# Altium PCB SensWear-V1R1-Debug.PcbDoc
Units mm, origin at the board's own origin, x right, y up, seen from the top; angles counter-clockwise.
Board outline 40 x 35 mm, 4 copper layers (L1, L2 (GND), L3 (VDD), L4), stack 0.33 mm thick; 25 components, 26 nets, 163 pads, 32 vias.
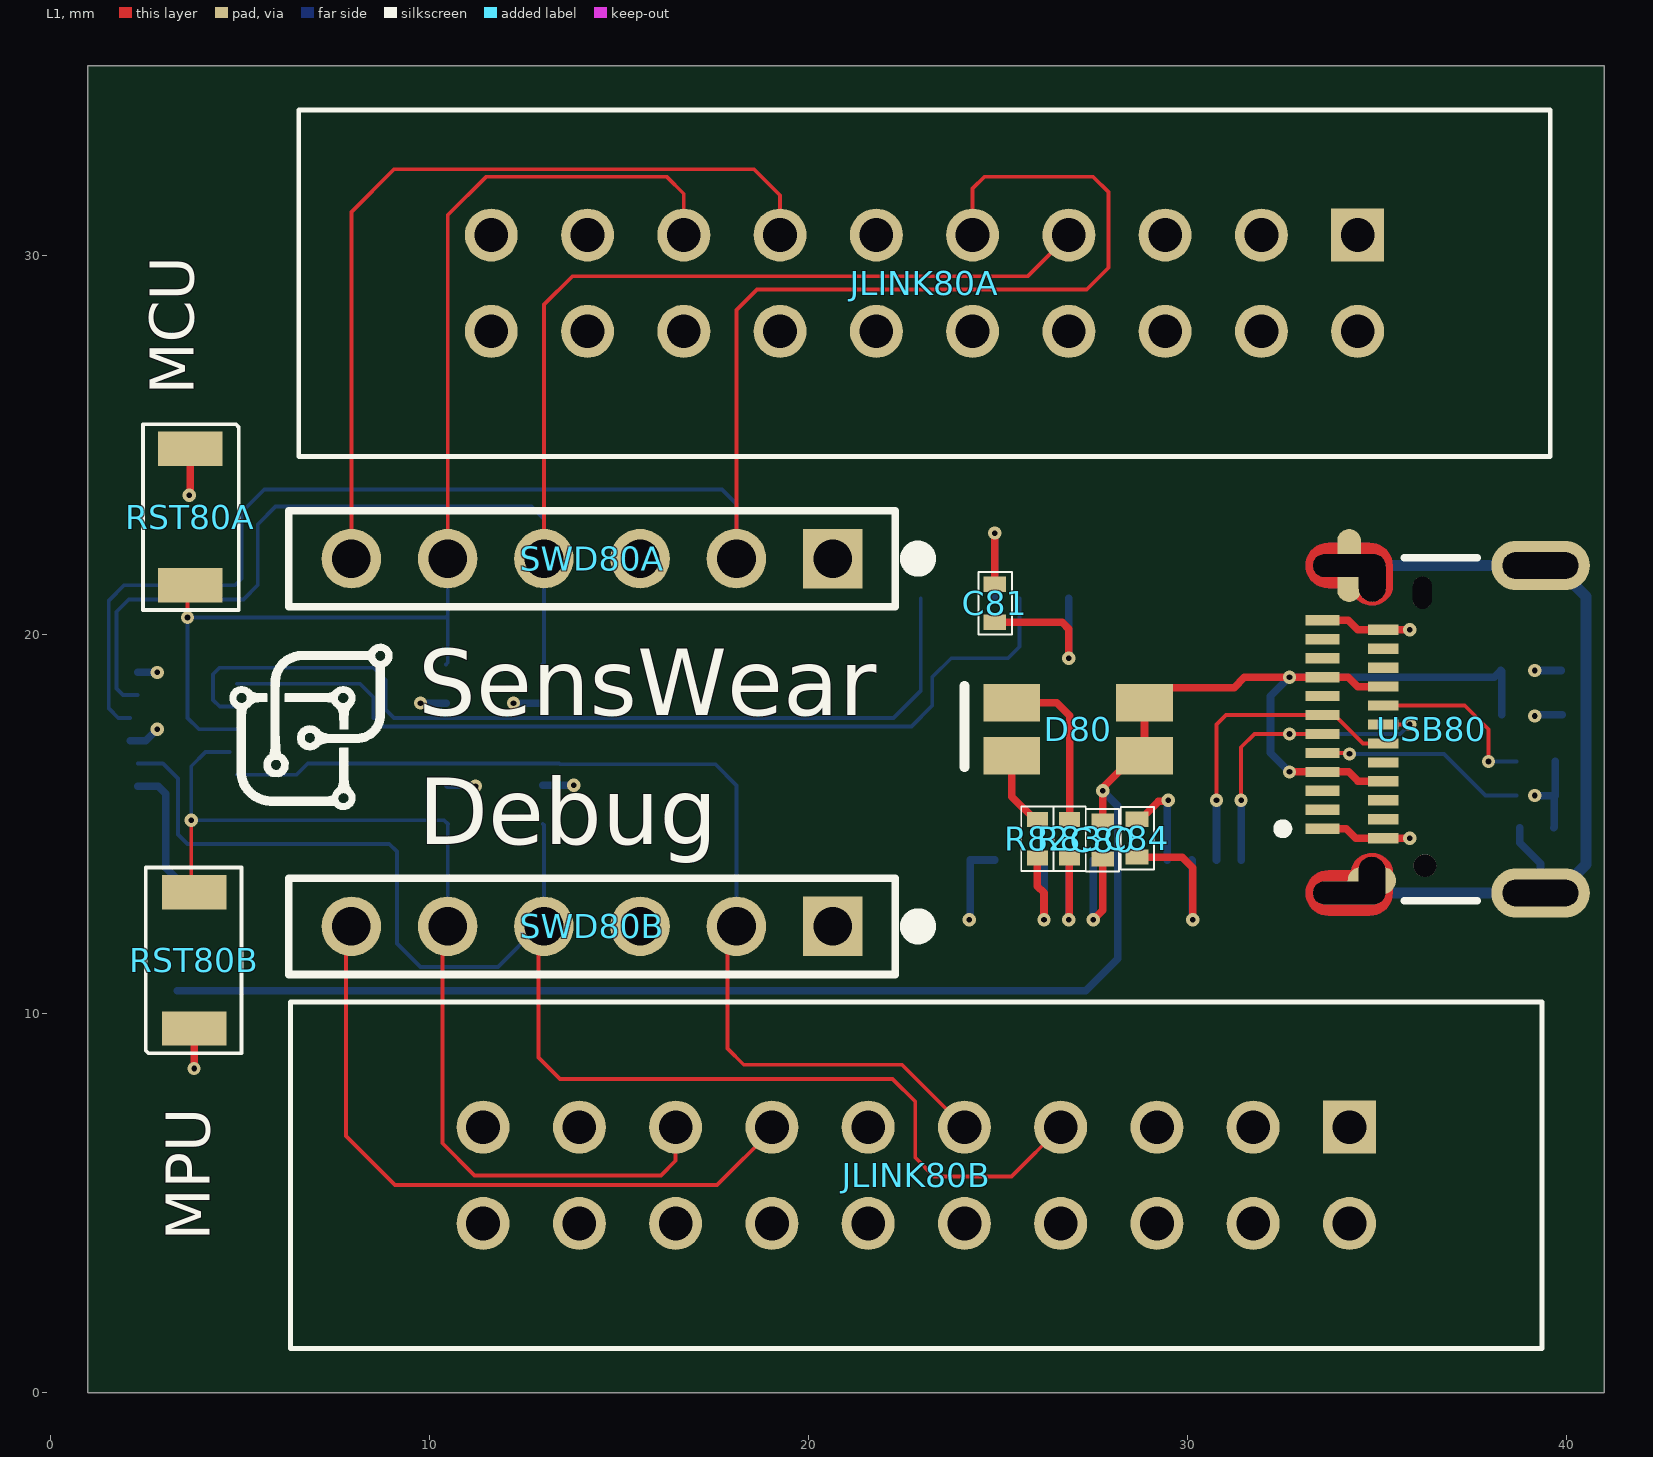
[diagram p0: L1 view]
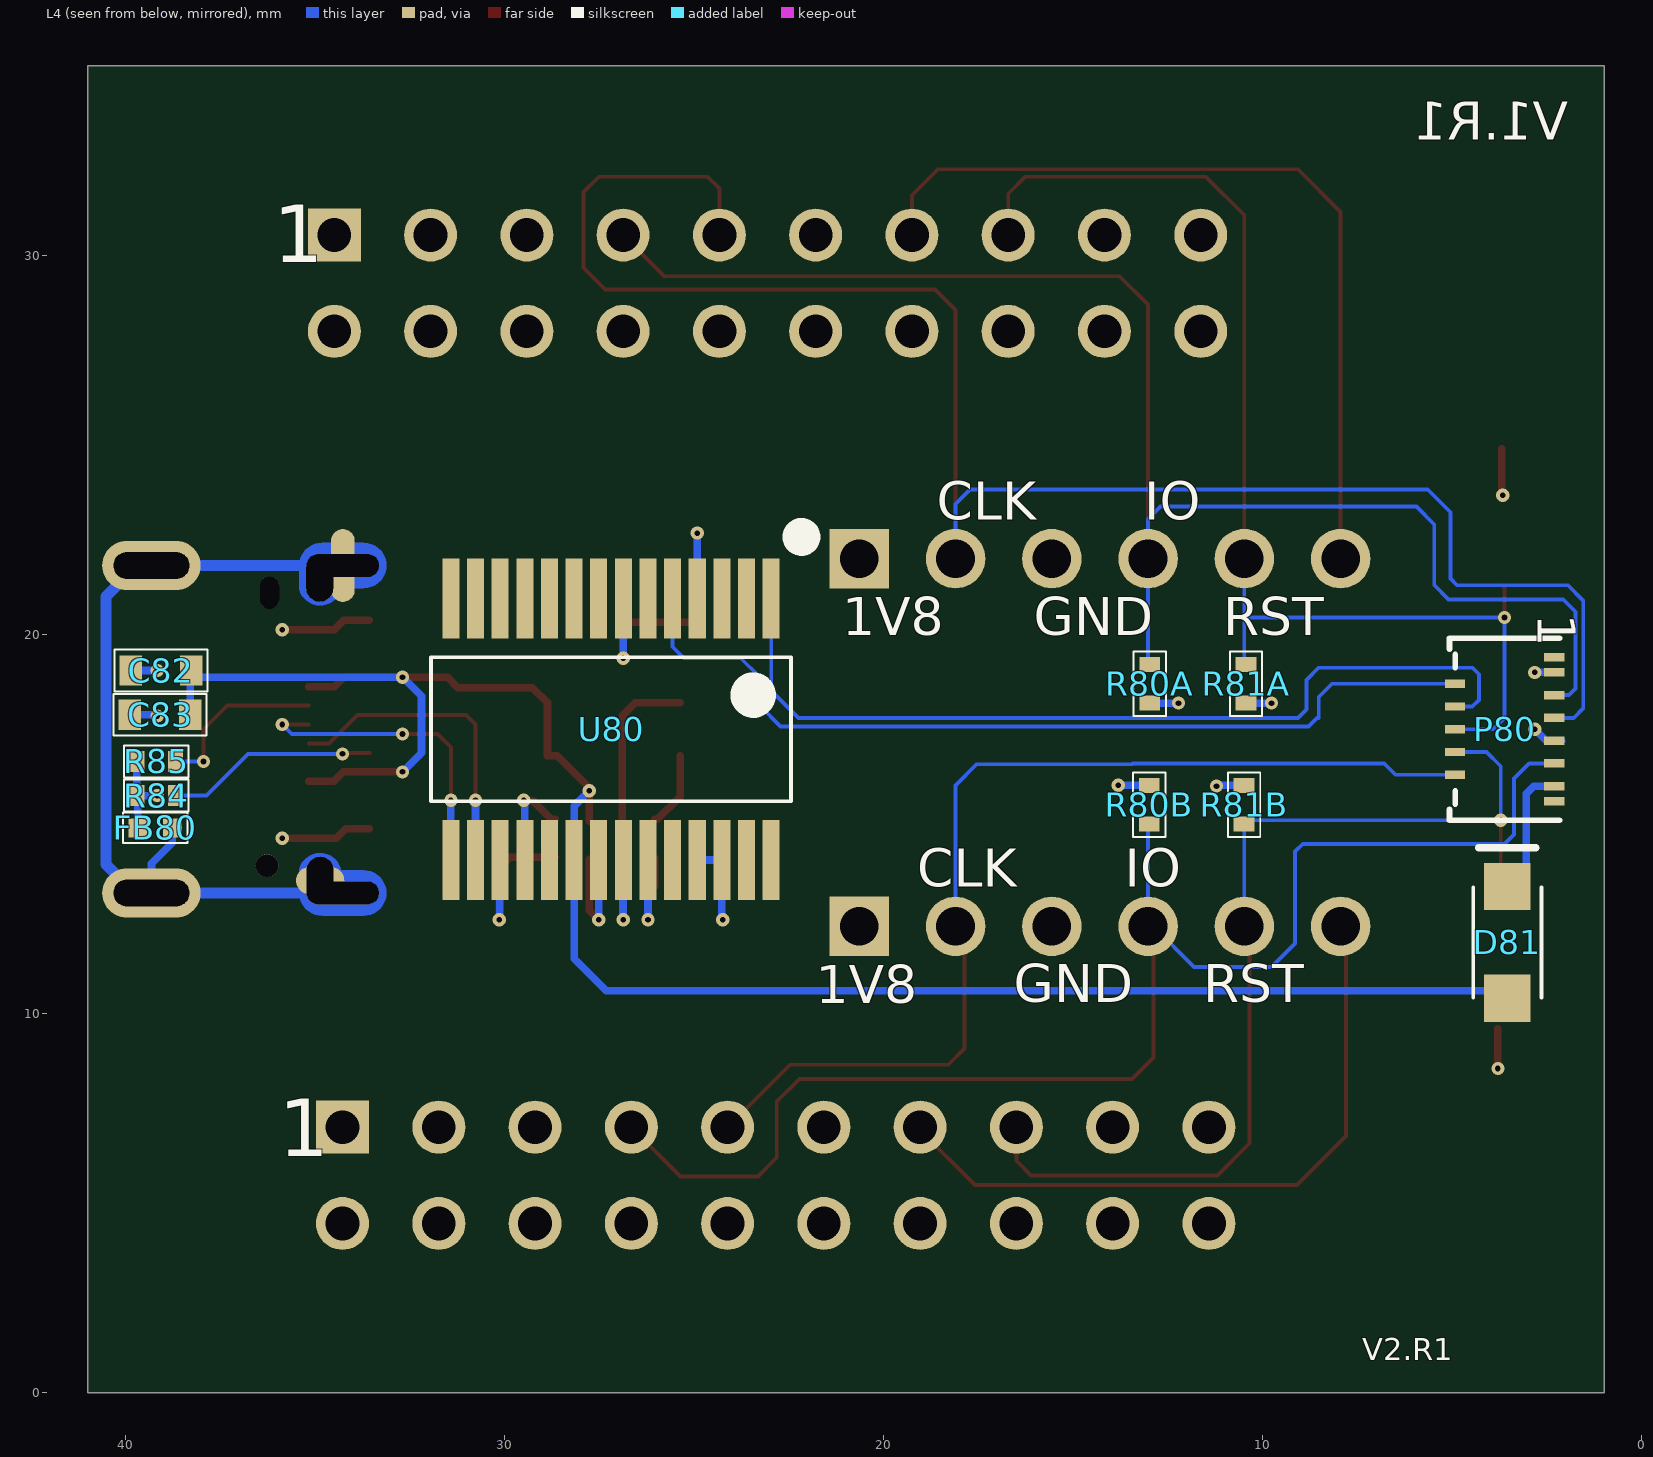
[diagram p1: L4 view, seen from below]
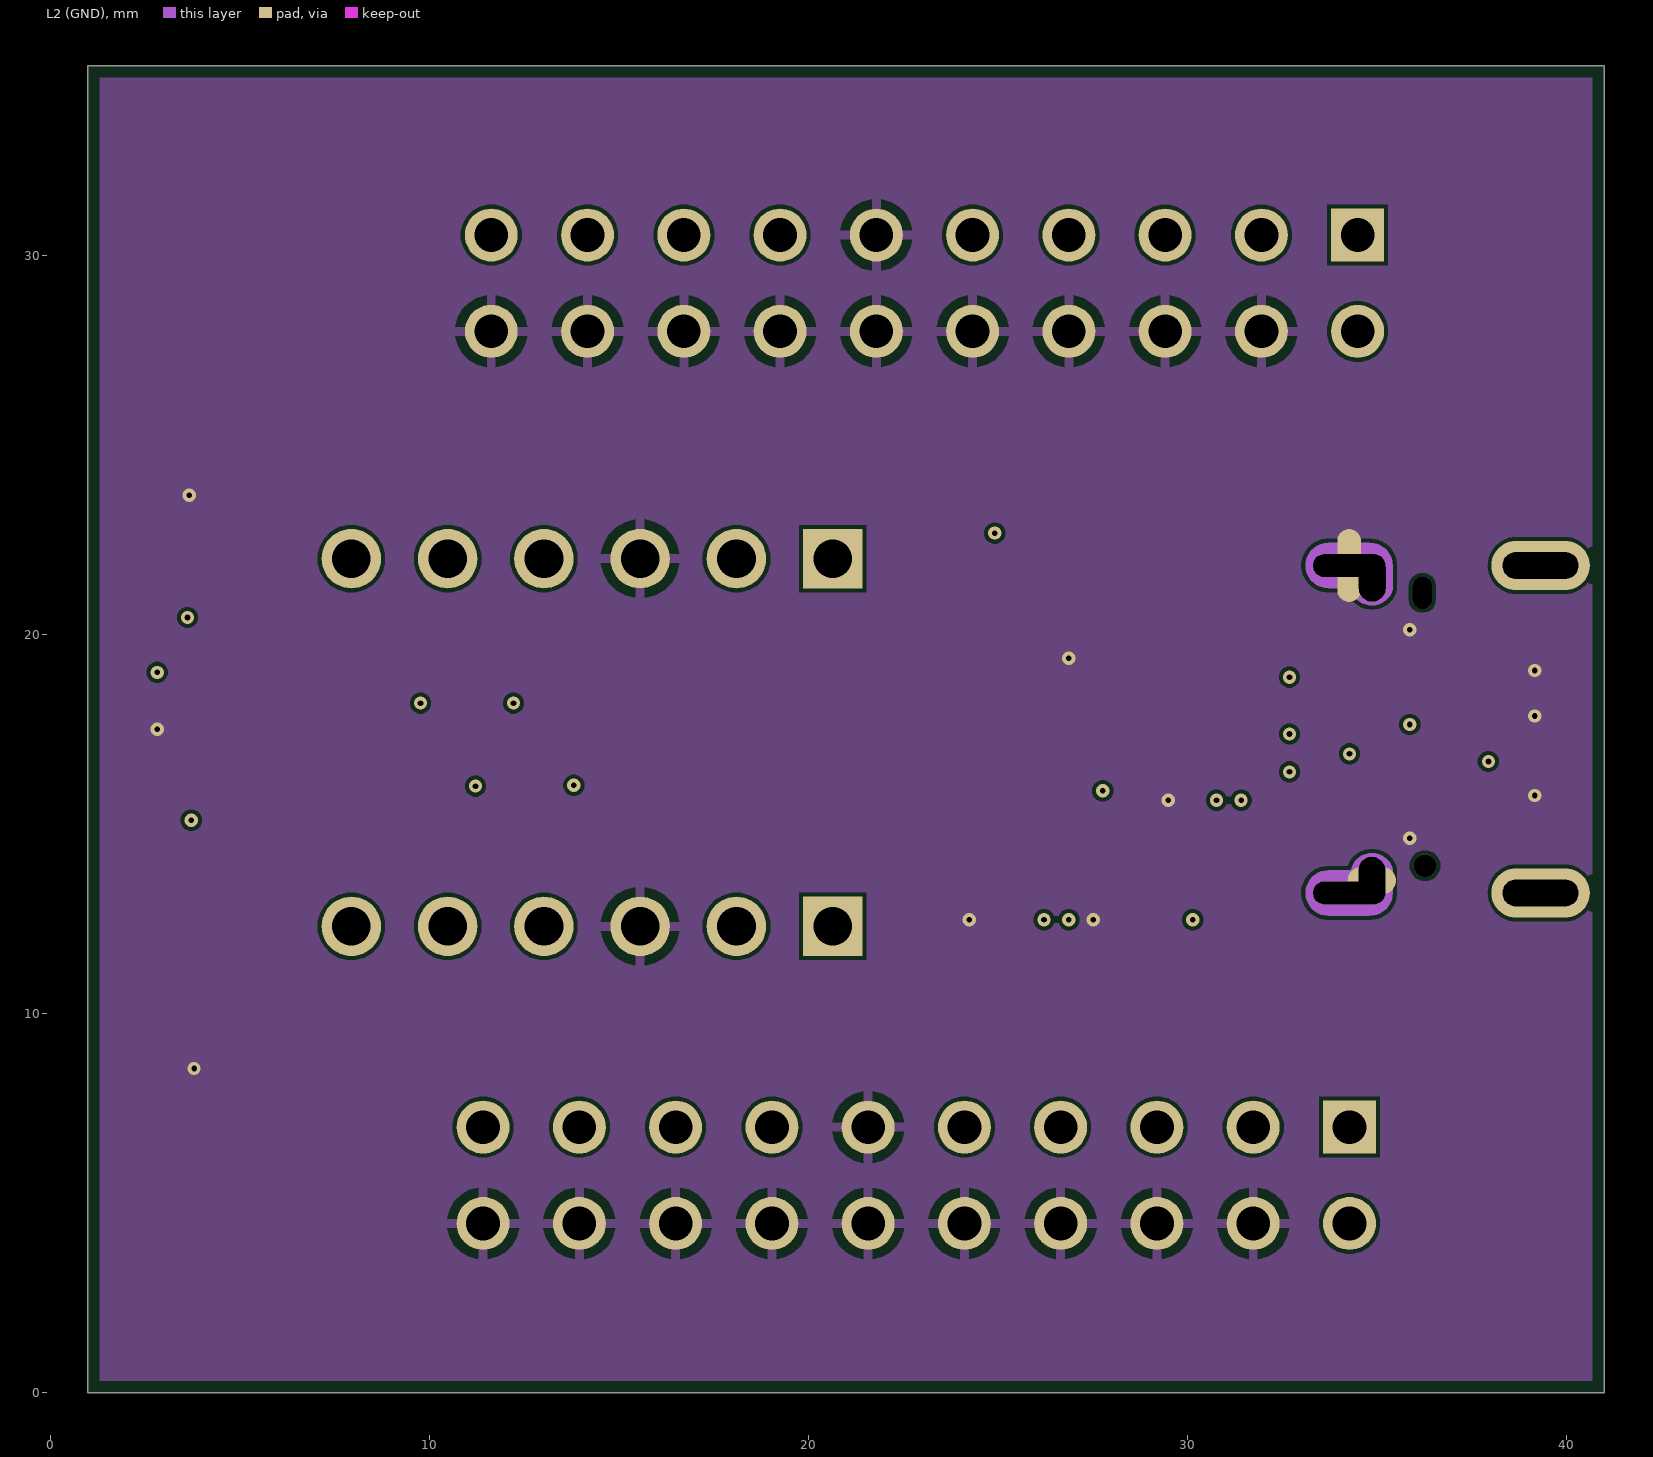
[diagram p2: L2 (GND)]
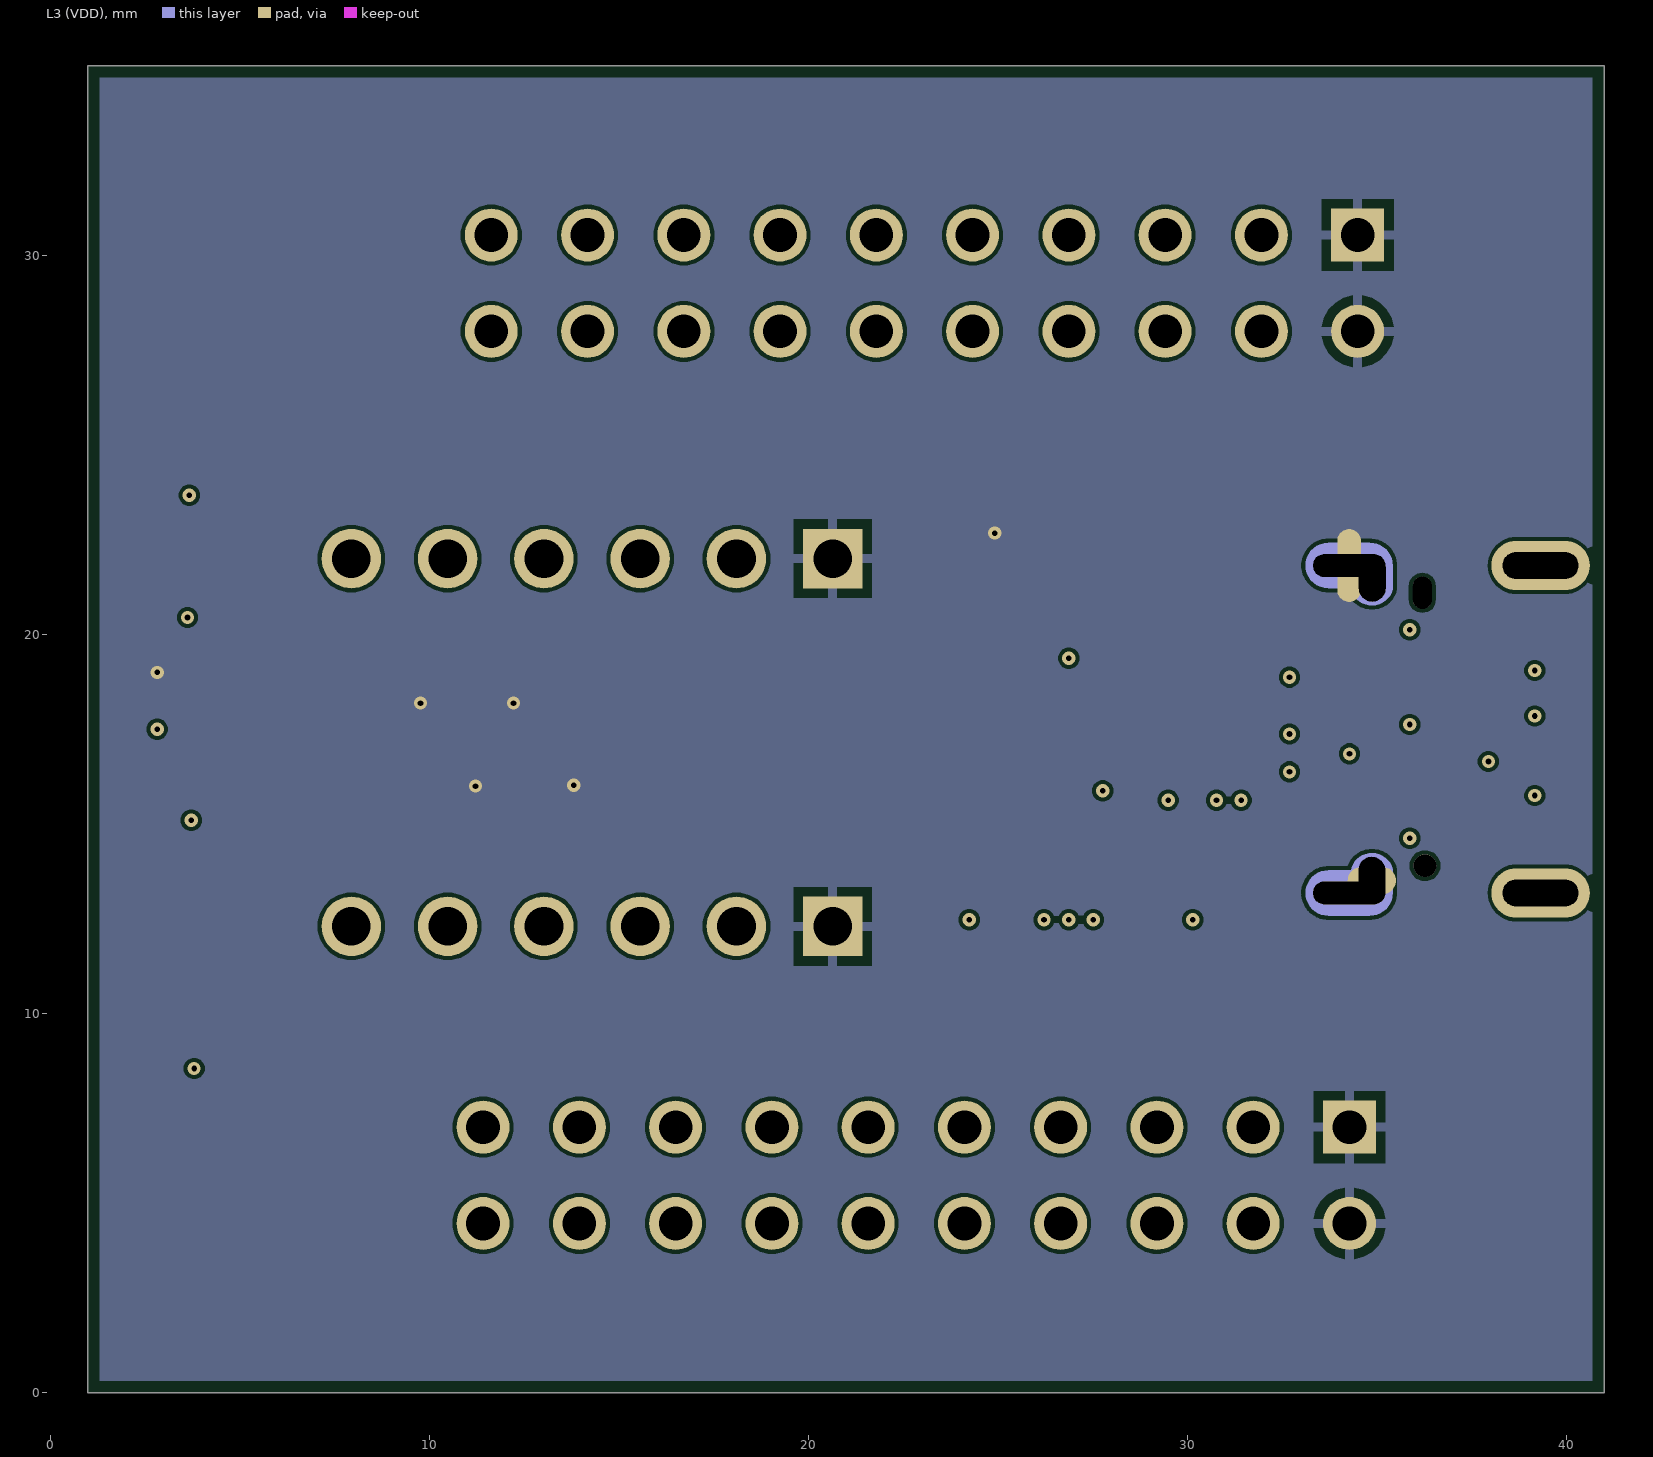
[diagram p3: L3 (VDD)]
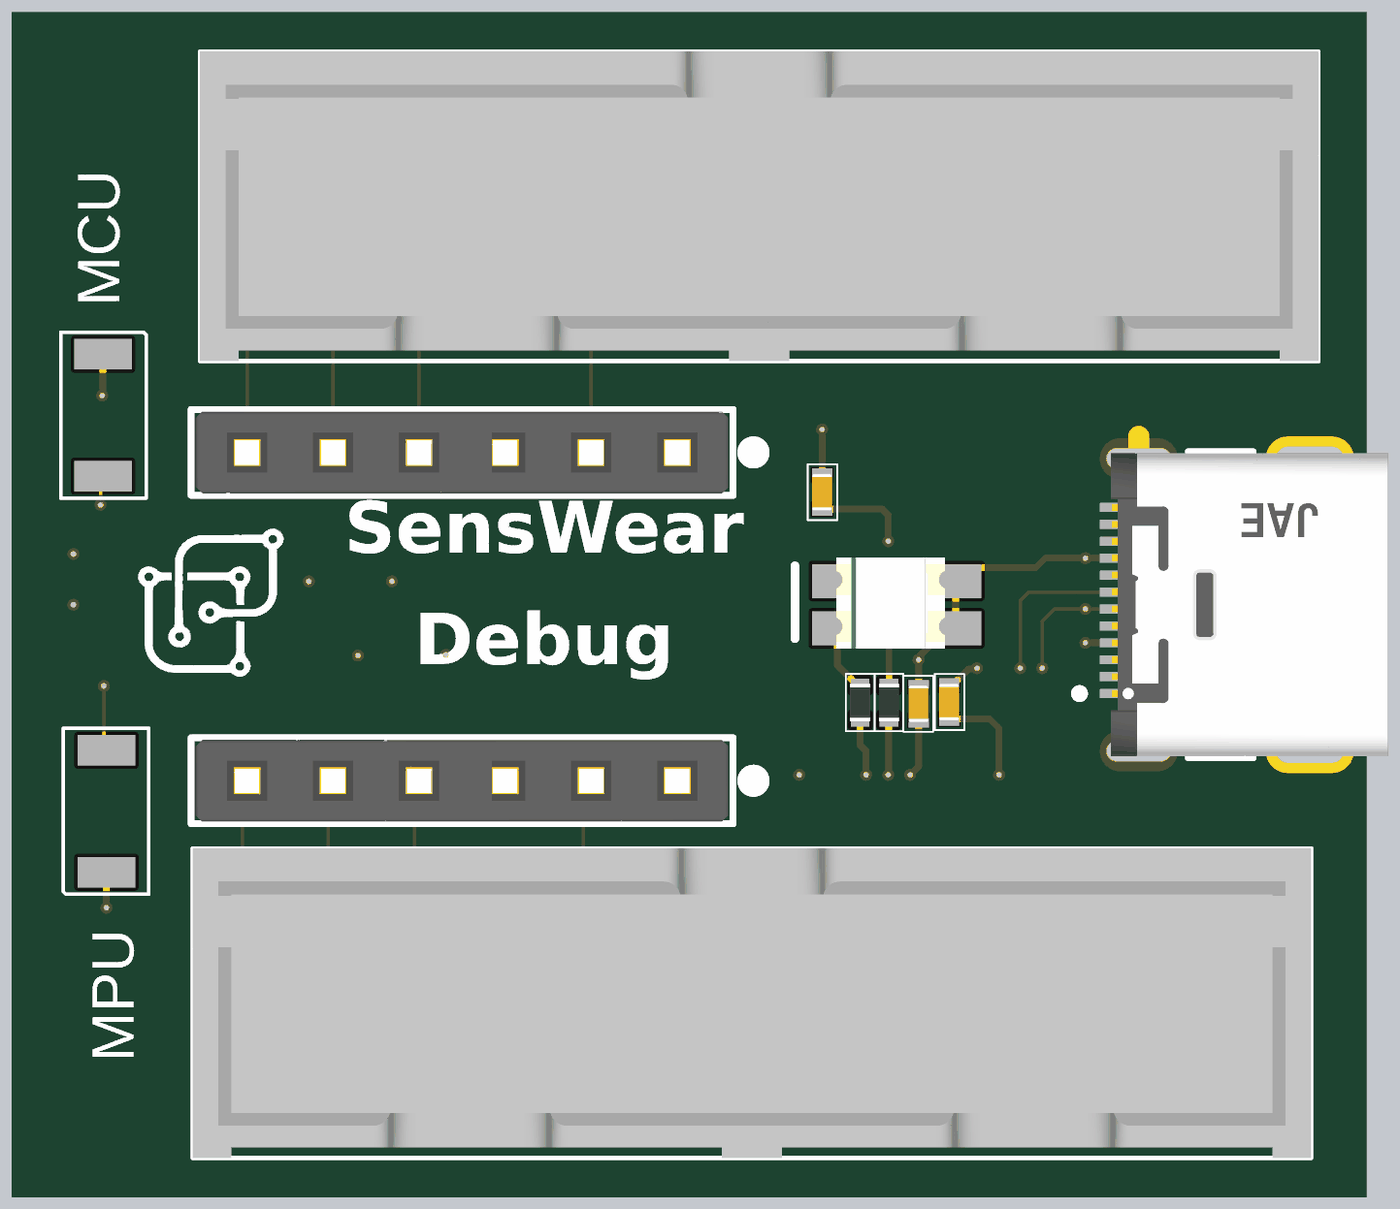
[diagram p4: 3D render of the assembled board from above, using the file's embedded part models]
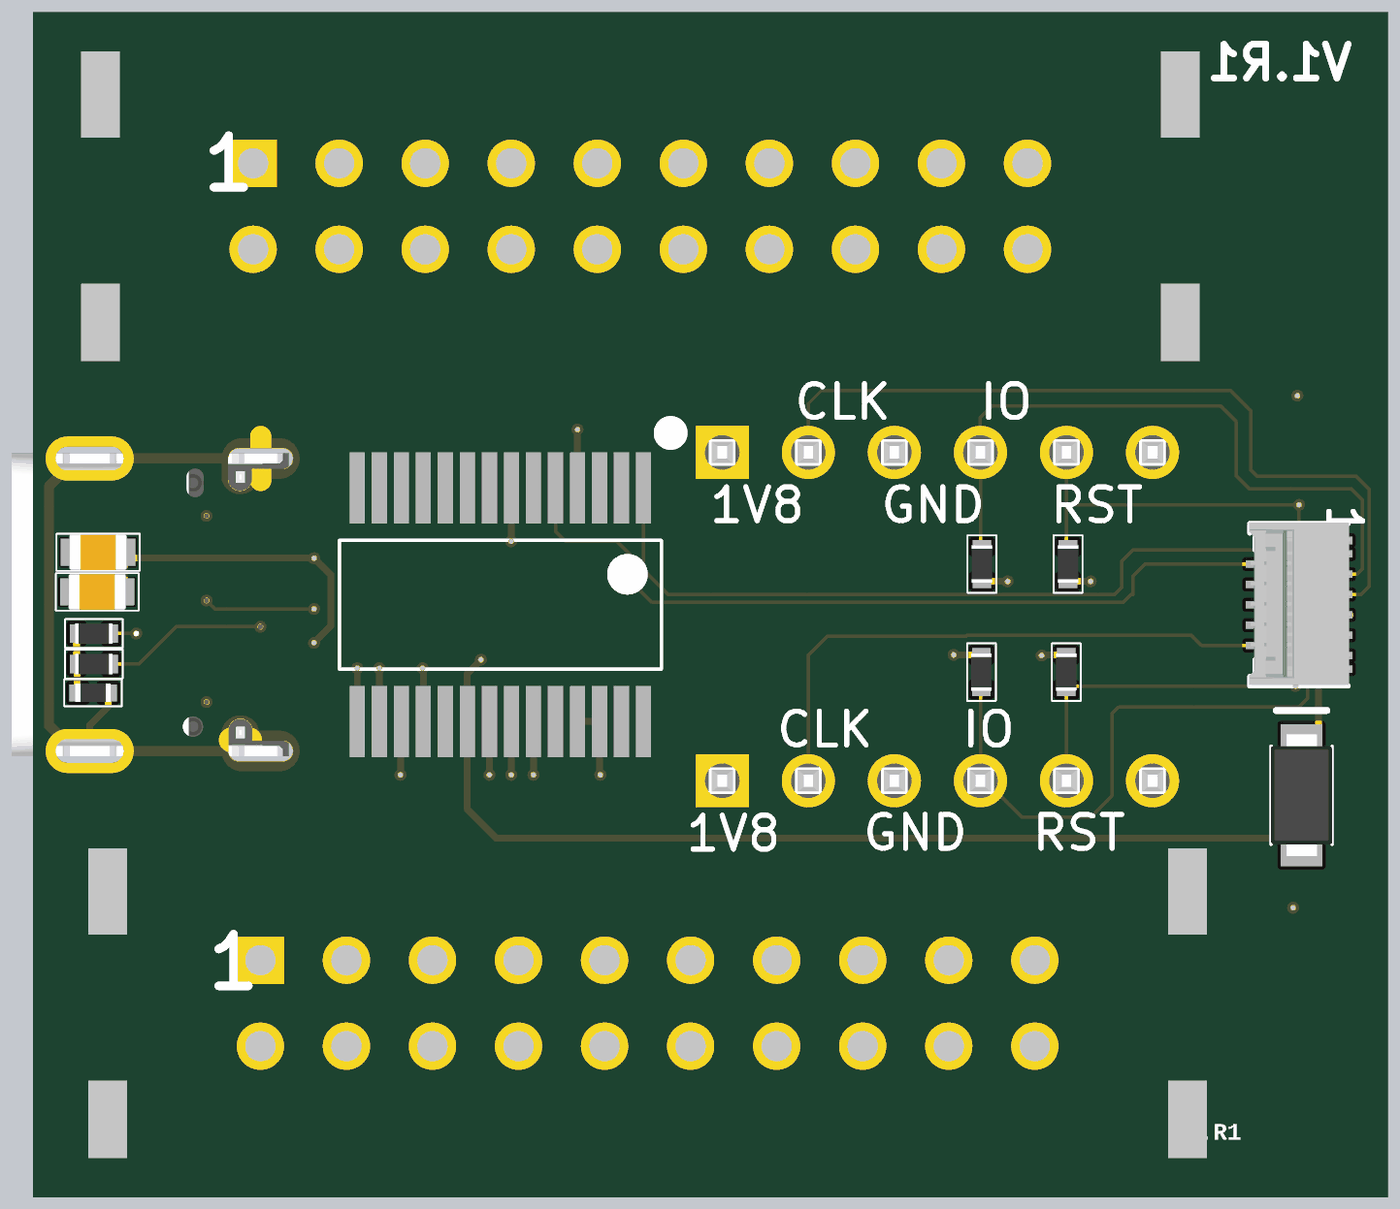
[diagram p5: 3D render of the assembled board from below, using the file's embedded part models]

## Layer stack, top to bottom
Top Solder: solder mask 0.01, Solder Resist, Dk 4.2
L1: signal copper 0.018
Dielectric1: prepreg 0.075, PP (FR4-1080), Dk 3.6
L2 (GND): signal copper 0.035
Dielectric 11: prepreg 0.074, PP (FR4-1080), Dk 3.6
L3 (VDD): signal copper 0.035
Dielectric 9: prepreg 0.075, PP (FR4-1080), Dk 3.6
L4: signal copper 0.018
Bottom Solder: solder mask 0.01, Solder Resist, Dk 4.2

## Board outline
1,0 41,0 41,35 1,35

## Design rules (kind name [scope] priority, off if disabled: settings)
AcuteAngle [All] p1: minimum=4.50000000000000E+0001 checktracksonly=FALSE
AssemblyTestPointUsage [All] p1 off:
AssemblyTestpoint [All] p1 off: testpointundercomponent=TRUE minsize=1.016 maxsize=2.54 preferedsize=1.524 minholesize=0 maxholesize=1.016 preferedholesize=0.813 testpointgrid=0.025 usegrid=TRUE gridtolerance=0 allowsidetop=TRUE allowsidebottom=TRUE
BoardOutlineClearance [All] p1: gap=0.3 ignorepadtopadclearanceinfootprint=FALSE
Clearance Clearance_RF_Nets [IsTrack And (OnLayer('L1') Or OnLayer('L6')) And (InNet('NetANT3_1') Or InNet('NetANT2_1') Or InNet('NetANT1_1')) vs InNet('GND')] p1: gap=0.25 ignorepadtopadclearanceinfootprint=FALSE
Clearance Clearance_RF_Diff_Pairs [IsTrack And (OnLayer('L1') Or OnLayer('L8')) And InDifferentialPair('RF_ANT_9') vs (InNet('GND') AND InPolygon)] p2: gap=0.1 ignorepadtopadclearanceinfootprint=FALSE except(0: Arc-Hole Track-Hole SMDPad-Hole THPad-Hole Via-Hole Fill-Hole Poly-Hole Region-Hole Text-Hole)
Clearance "Pad Clearance" [IsPad vs IsPad] p3: gap=0.15 ignorepadtopadclearanceinfootprint=FALSE except(0: Arc-Hole Track-Hole SMDPad-Hole THPad-Hole Via-Hole Fill-Hole Poly-Hole Region-Hole Text-Hole)
Clearance uViaClearance [ISVia and InDrillLayerPair('L1 - L2 (GND)') vs ISPad] p4: gap=0.1 ignorepadtopadclearanceinfootprint=FALSE except(0: Arc-Hole Track-Hole SMDPad-Hole THPad-Hole Via-Hole Fill-Hole Poly-Hole Region-Hole Text-Hole)
Clearance "Pad Clearance_1" [IsPad vs IsTrack] p5: gap=0.1 ignorepadtopadclearanceinfootprint=FALSE except(0: Arc-Hole Track-Hole SMDPad-Hole THPad-Hole Via-Hole Fill-Hole Poly-Hole Region-Hole Text-Hole)
Clearance "Clearance Non Plated Holes" [InPadClass('NPTH')] p6: gap=0.22 ignorepadtopadclearanceinfootprint=FALSE
Clearance "Poly to Poly Outer Layers" [IsRegion AND (OnLayer('L1') OR OnLayer('L8')) vs IsRegion or IsTrack] p7: gap=0.1 ignorepadtopadclearanceinfootprint=FALSE except(0: Arc-Hole Track-Hole SMDPad-Hole THPad-Hole Via-Hole Fill-Hole Poly-Hole Region-Hole Text-Hole)
Clearance Clearance_KeepOutComponent [IsComponent vs OnLayer('Keep-Out Layer')] p8: gap=3 ignorepadtopadclearanceinfootprint=FALSE except(0: Arc-Hole Track-Hole SMDPad-Hole THPad-Hole Via-Hole Fill-Hole Poly-Hole Region-Hole Text-Hole)
Clearance Clearance_KeepOutSignal [InNetClass('All Nets') vs OnLayer('Keep-Out Layer')] p9: gap=0.2 ignorepadtopadclearanceinfootprint=FALSE except(0: Arc-Hole Track-Hole SMDPad-Hole THPad-Hole Via-Hole Fill-Hole Poly-Hole Region-Hole Text-Hole)
Clearance [All] p10: gap=0.1 ignorepadtopadclearanceinfootprint=FALSE except(0: Arc-Hole Track-Hole SMDPad-Hole THPad-Hole Via-Hole Fill-Hole Poly-Hole Region-Hole Text-Hole)
ComponentClearance [All] p1: gap=0.1 collisioncheckmode=3 verticalgap=0.254 showdistances=TRUE
DiffPairsRouting DiffPair_BT_RF_ANT [InDifferentialPair ('RF_ANT_9')] p1: maxlimit=0.5 minlimit=0.25 mostfreqgap=0.254 toplayer_maxgap=0.25 toplayer_prefgap=0.25 toplayer_minwidth=0.1 toplayer_maxwidth=0.12 toplayer_prefwidth=0.1 midlayer1_maxgap=0.254 midlayer1_minwidth=0.381 midlayer1_maxwidth=0.381 midlayer1_prefwidth=0.381 midlayer4_prefgap=0.25 midlayer4_minwidth=0.12 midlayer4_maxwidth=0.3 midlayer4_prefwidth=0.15 bottomlayer_prefgap=0.25 bottomlayer_minwidth=0.12 bottomlayer_maxwidth=0.3 bottomlayer_prefwidth=0.15 maxuncoupledlength=12.7
DiffPairsRouting [All] p2 off: maxlimit=0.3 minlimit=0.1 mostfreqgap=0.12 toplayer_minwidth=0.1 toplayer_maxwidth=0.381 toplayer_prefwidth=0.15 midlayer1_maxgap=0.1 midlayer1_prefgap=0.1 midlayer1_minwidth=0.12 midlayer1_maxwidth=0.12 midlayer1_prefwidth=0.12 midlayer4_maxgap=0.1 midlayer4_prefgap=0.1 midlayer4_minwidth=0.12 midlayer4_maxwidth=0.12 midlayer4_prefwidth=0.12 bottomlayer_minwidth=0.1 bottomlayer_maxwidth=0.381 bottomlayer_prefwidth=0.15 maxuncoupledlength=0
FabricationTestPointUsage [All] p1 off: valid=0 allowmultiple=FALSE
FabricationTestpoint [All] p1 off: side=3 testpointundercomponent=TRUE minsize=1.016 maxsize=2.54 preferedsize=1.524 minholesize=0 maxholesize=1.016 preferedholesize=0.813 testpointgrid=0.025 allowsidetop=TRUE allowsidebottom=TRUE usegrid=TRUE gridtolerance=0
FanoutControl Fanout_BGA [IsBGA] p1: bgadir=Out bgaviamode=Centered fanoutstyle=Auto fanoutdirection=OutOnly viagrid=0.025 // Fanout_BGA (Default Rule)
FanoutControl Fanout_LCC [IsLCC] p2: bgadir=Out bgaviamode=Centered fanoutstyle=Auto fanoutdirection=InOnly viagrid=0.025 // Fanout_LCC (Default Rule)
FanoutControl Fanout_SOIC [IsSOIC] p3: bgadir=Out bgaviamode=Centered fanoutstyle=Auto fanoutdirection=InOnly viagrid=0.025 // Fanout_SOIC (Default Rule)
FanoutControl Fanout_Small [(CompPinCount < 5)] p4: bgadir=Out bgaviamode=Centered fanoutstyle=Auto fanoutdirection=OutOnly viagrid=0.025 // Fanout_Small (Default Rule)
FanoutControl Fanout_Default [All] p5: bgadir=Out bgaviamode=Centered fanoutstyle=Auto fanoutdirection=OutOnly viagrid=0.025 // Fanout_Default (Default Rule)
HoleSize [All] p1: absolutevalues=TRUE maxlimit=10 minlimit=0 maxpercent=80.000 minpercent=20.000
HoleToHoleClearance [All] p1: gap=0.2 allowstackedmicrovias=TRUE
MatchedLengths DiffPair_BT_RF_ANTMatchedLengths [InDifferentialPair ('RF_ANT_4')] p1: tolerance=0.5 checknetsindiffpair=FALSE checkdiffpairvsdiffpair=TRUE checkxsignals=TRUE checkothers=TRUE
MaxMinImpedance [InNetClass('uSDHC4')] p1: minimum=49.00 maximum=51.00
MaxMinImpedance MaxMinImpedance_1 [InNetClass('DRAM_BANK0') Or InNetClass('DRAM_BANK1') Or InNetClass('DRAM_BANK2') Or InNetClass('DRAM_BANK3') Or InNetClass('DRAM_BANK4') Or InNetClass('DRAM_BANK5') Or InNetClass('DRAM_BANK6') Or InNetClass('DRAM_BANK7')] p2: minimum=49.00 maximum=51.00
MinimumAnnularRing [All] p1: minimumring=0.1
MinimumSolderMaskSliver [All] p1: minsoldermaskwidth=0.09
NetAntennae [Not InNet('NetL9_1')] p1: netantennaetolerance=0
OvershootFalling [All] p1: maximum=100.0m
OvershootRising [All] p1: maximum=100.0m
PlaneClearance [not InNet('GND')] p1: clearance=0.3
PlaneConnect GND_PAD [IsPad And InNet('GND')] p1: pad.planeconnectstyle=Relief pad.reliefexpansion=0.1 pad.reliefentries=4 pad.reliefconductorwidth=0.2 pad.reliefairgap=0.3 via.planeconnectstyle=Direct via.reliefexpansion=0.3 via.reliefentries=4 via.reliefconductorwidth=0.5 via.reliefairgap=0.2
PlaneConnect [All] p2: planeconnectstyle=Relief reliefexpansion=0.2 reliefentries=4 reliefconductorwidth=0.15 reliefairgap=0.2
PolygonConnect PolygonConnect_VIA_PAD [IsVia or (IsPad And OnMultiLayer)] p1: thpad.connectstyle=Relief thpad.reliefconductorwidth=0.25 thpad.reliefentries=4 thpad.polygonreliefangle="90 Angle" thpad.airgapwidth=0.25 smdpad.connectstyle=Relief smdpad.reliefconductorwidth=0.25 smdpad.reliefentries=4 smdpad.polygonreliefangle="90 Angle" smdpad.airgapwidth=0.25 via.connectstyle=Direct via.reliefconductorwidth=0.25 via.reliefentries=4 via.polygonreliefangle="90 Angle" via.airgapwidth=0.25
PolygonConnect [All] p2: connectstyle=Relief reliefconductorwidth=0.25 reliefentries=4 polygonreliefangle="90 Angle" airgapwidth=0.3
RoutingTopology RoutingTopology_DDRAddressAndControls [InNetClass('DDR_AddressAndControls')] p1: topology=Daisy_Simple
RoutingTopology [All] p2: topology=Shortest
RoutingVias RoutingVias_uVias [(IsVia and (ViaSize <= '0.3')) or IsMicroVia] p1: holewidth=0.1 width=0.35 viastyle="Through Hole" minholewidth=0 minwidth=0.3 maxholewidth=0.1 maxwidth=0.35
RoutingVias [IsVia] p2: holewidth=0.1 width=0.4 viastyle="Through Hole" minholewidth=0.05 minwidth=0.3 maxholewidth=0.5 maxwidth=1
SilkToSilkClearance [All] p1: silktosilkclearance=0.05
SilkToSolderMaskClearance SilkscreenOverComponentPads [IsPad] p1: minsilkscreentomaskgap=0.1 clearancetoexposedcopper=TRUE
SolderMaskExpansion SolderMaskExpansion_Via [isVia] p1: expansion=0 istentingtop=FALSE
SolderMaskExpansion SolderMaskExpansion_AllButVia [Not IsVia] p2: expansion=0 istentingtop=FALSE
SolderMaskExpansion [All] p3: expansion=0.102 istentingtop=FALSE
SupplyNets "Schematic Supply Nets_3" [InNet('CHG_AC')] p1: voltage=0.000
SupplyNets "Schematic Supply Nets_2" [InNet('GND')] p2: voltage=0.000
SupplyNets "Schematic Supply Nets_1" [InNet('VBUS_UART')] p3: voltage=0.000
SupplyNets "Schematic Supply Nets" [InNet('1V8')] p4: voltage=0.000
UnRoutedNet [All] p1: checkbadconnections=TRUE
UndershootFalling [All] p1: maximum=100.0m
UndershootRising [All] p1: maximum=100.0m
UnpouredPolygon [All] p1: allowshelved=TRUE
ViasUnderSMD [All] p1: allowed=TRUE
Width BT_RF_ANT_DIFF_PAIR [InDifferentialPairClass('RF_ANT_9')] p1: maxlimit=0.18 minlimit=0.1 preferedwidth=0.152 toplayer_maxwidth=0.15 toplayer_prefwidth=0.1 midlayer1_minwidth=0.127 midlayer4_minwidth=0.12 midlayer4_maxwidth=0.15 midlayer4_prefwidth=0.13 bottomlayer_minwidth=0.12 bottomlayer_maxwidth=0.15 bottomlayer_prefwidth=0.13 minimp=37.500000 maximp=47.500000 favimp=42.500000
Width "Width Ground" [InNet('GND')] p2: maxlimit=40 minlimit=0.1 preferedwidth=0.4
Width [All] p3: maxlimit=2 minlimit=0.1 preferedwidth=0.12 toplayer_prefwidth=0.1 midlayer1_prefwidth=0.1 bottomlayer_prefwidth=0.1 minimp=50.000000 maximp=50.000000 favimp=50.000000
8 further rules are at their usual default settings.

## Classes and differential pairs
channel class SensWear_SWD: U_SWD_MCU U_SWD_MPU
component class U_SWD_MPU: JLINK80B R80B R81B RST80B SWD80B
component class U_SWD_MCU: JLINK80A R80A R81A RST80A SWD80A
component class U_UART2USB: C80 C81 C82 C83 C84 D80 FB80 R82 R83 R84 R85 U80 USB80
component class U_DebugConnector: D81 P80

## Components (designator, comment, footprint, x,y, rotation, side; value= is the part's Value field where it differs from the comment)
C80 "0.1 uF" CAPC1005X05N 27.775,14.575 r270 top
C81 "0.1 uF" CAPC1005X05N 24.925,20.825 r90 top
C82 "4.7uF" CAPC1610X05N 39.075,19.05 r180 bottom
C83 "4.7uF" CAPC1610X05N 39.1,17.88 r180 bottom
C84 "0.1 uF" CAPC1005X05N 28.675,14.625 r90 top
D80 "LTST-C155KGJRKT" LTST-C155KGJRKT 27.125,17.5 r0 top
D81 "MBR140SFT1G" SODFL360X110-2N 3.55,11.875 r270 bottom
FB80 "BLM15AG601SN1D" MURA-BLM15-CHIP-2_V 39.225,14.9 r180 bottom
JLINK80A "5103308-5" TE_5103308-5 34.5,30.54 r0 top (schematic designator JLINK80)
JLINK80B "5103308-5" TE_5103308-5 34.285,7 r0 top (schematic designator JLINK80)
P80 "504754-1100" 5047541100__3 3.625,17.5 r90 bottom
R80A "10 k" RESC1005X04N 12.985,18.7 r270 bottom (schematic designator R80)
R80B "10 k" RESC1005X04N 13,15.51 r90 bottom (schematic designator R80)
R81A "10 k" RESC1005X04N 10.445,18.7 r270 bottom (schematic designator R81)
R81B "10 k" RESC1005X04N 10.495,15.51 r90 bottom (schematic designator R81)
R82 "100 R" RESC1005X04N 26.05,14.61 r270 top
R83 "100 R" RESC1005X04N 26.9,14.61 r270 top
R84 "5.1 k" RESC1005X04N 39.2,15.75 r0 bottom
R85 "5.1 k" RESC1005X04N 39.2,16.65 r0 bottom
RST80A "B3U-1000P" B3U-1000P 3.7,23.1 r90 top (schematic designator RST80)
RST80B "B3U-1000P" B3U-1000P 3.8,11.4 r270 top (schematic designator RST80)
SWD80A "SSQ-106-23-F-S" FP-SSQ-106-23-F-S-MFG 14.3,22 r180 top (schematic designator SWD80)
SWD80B "SSQ-106-23-F-S" FP-SSQ-106-23-F-S-MFG 14.3,12.3 r180 top (schematic designator SWD80)
U80 "FT232RL" SOP65P780X200-28N 27.2,17.5 r270 bottom
USB80 "DX07S024JJ3R1300" JAE-DX07S024JJ3R1300-MFG 37.54,17.5 r90 top

## Footprints (in the part's own frame and the unit in brackets; to place one, negate y for a bottom-side part, rotate by r counter-clockwise, add the part's x,y. Pads: shape width x height; smd on the part's side, far side on the other; paste and mask are expansions set on the pad)
5047541100__3 [mm]
  rect 0.22x0.54 smd: 1(-1.5,-1.31) 3(-0.9,-1.31) 5(-0.3,-1.31) 7(0.3,-1.31) 9(0.9,-1.31) 11(1.5,-1.31) P1(-1.9,-1.31) P2(1.9,-1.31)
  rect 0.22x0.53 smd: 2(-1.2,1.31) 4(-0.6,1.31) 6(0,1.31) 8(0.6,1.31) 10(1.2,1.31)
  silkscreen extent -2.4,-1.45 2.4,1.45, body extent -2.37,-1.53 2.43,1.48, height 1.46
B3U-1000P [mm]
  rect 0.9x1.7 smd: 1(-1.8,0) 2(1.8,0)
  silkscreen extent -2.45,-1.28 2.45,1.25, body extent -2,-1.25 2,1.25, height 1.6
CAPC1005X05N [mm] "Chip Capacitor, 2-Leads, Body 1.00x0.50mm, IPC Medium Density"
  rect 0.4x0.6 smd mask+0.04: 1(-0.5,0) 2(0.5,0)
  silkscreen extent -0.82,-0.45 0.82,0.43, body extent -0.55,-0.3 0.55,0.3, height 0.6
CAPC1610X05N [mm] "Chip Capacitor, 2-Leads, Body 1.60x1.00mm, IPC Medium Density"
  rect 0.6x0.8 smd mask+0.05: 1(-0.8,0) 2(0.8,0)
  silkscreen extent -1.22,-0.55 1.22,0.55, body extent -0.85,-0.52 0.85,0.53, height 1
FP-SSQ-106-23-F-S-MFG [mm]
  rect 1.57x1.57 hole 1.02 paste-2539.97 mask+0: 1(-6.35,0)
  round 1.57 hole 1.02 paste-2539.97 mask+0: 2(-3.81,0) 3(-1.27,0) 4(1.27,0) 5(3.81,0) 6(6.35,0)
  silkscreen extent -8.73,-1.27 8,1.27, body extent -8.1,-1.37 8.1,1.37, height 0.25
JAE-DX07S024JJ3R1300-MFG [mm]
  rect 0.27x0.9 smd paste+0 mask+0: A1(-2.625,3.965) A2(-2.125,3.965) A3(-1.625,3.965) A4(-1.125,3.965) A5(-0.625,3.965) A6(-0.125,3.965) A7(0.375,3.965) A8(0.875,3.965) A9(1.375,3.965) A10(1.875,3.965) A11(2.375,3.965) A12(2.875,3.965)
  rect 0.27x0.8 smd paste+0 mask+0: B1(2.625,2.365) B2(2.125,2.365) B3(1.625,2.365) B4(1.125,2.365) B5(0.625,2.365) B6(0.125,2.365) B7(-0.375,2.365) B8(-0.875,2.365) B9(-1.375,2.365) B10(-1.875,2.365) B11(-2.375,2.365) B12(-2.875,2.365)
  rrect100% 0.6x1.9 hole 1.9 slot 0.6 at 0 deg paste-2539.97 mask+0: S1(-4.32,3.265)
  oval 0.725x1.275 hole 0.7 slot 1.25 at 0 deg paste-2539.97 mask+0: S1(-3.995,2.665)
  rrect100% 1.25x0.7 hole 0.7 slot 1.25 at 0 deg paste-2539.97 mask+0: S2(3.995,2.655)
  oval 1.925x0.625 hole 1.9 slot 0.6 at 0 deg paste-2539.97 mask+0: S2(4.32,3.265)
  rrect100% 1.3x2.6 hole 2 slot 0.7 at 0 deg paste-2539.97 mask+0: S3(-4.32,-1.785) S4(4.32,-1.785)
  round 0.6 hole 0.6 unplated paste-2539.97 mask+0: ""(-3.6,1.265)
  rrect100% 0.85x0.5 hole 0.5 slot 0.85 at 0 deg unplated paste-2539.97 mask+0: ""(3.6,1.33)
  silkscreen extent -4.52,-0.11 4.52,5.14, body extent -4.47,-4.09 4.47,4.09, height 3.29
LTST-C155KGJRKT [mm]
  rect 1.5x1 smd: 1(1.75,0.7) 2(1.75,-0.7) 3(-1.75,0.7) 4(-1.75,-0.7)
  silkscreen extent -3,-1 -3,1.15, body extent -1.77,-1.3 1.43,1.4, height 1.1
MURA-BLM15-CHIP-2_V [mm] "Chip Ferrite Bead, 2-Leads, Body 1x0.5mm"
  rect 0.5x0.5 smd: 1(-0.45,0) 2(0.45,0)
  silkscreen extent -0.85,-0.4 0.85,0.4, body extent -0.52,-0.28 0.53,0.28, height 0.55
RESC1005X04N [mm] "Chip Resistor, 2-Leads, Body 1.00x0.50mm, IPC Medium Density"
  rect 0.4x0.55 smd: 1(-0.51,0) 2(0.51,0)
  silkscreen extent -0.85,-0.43 0.85,0.43, body extent -0.55,-0.3 0.55,0.3, height 0.6
SODFL360X110-2N [mm] "SODFL, 2-Leads, Body 1.65x3.60mm, IPC Medium Density"
  rect 1.25x1.22 smd: 1(-1.475,0) 2(1.475,0)
  silkscreen extent -2.5,-0.9 1.45,0.9, body extent -1.8,-0.9 1.8,0.9, height 1.1
SOP65P780X200-28N [mm] "SOP, 28-Leads, Body 10,5x5,6mm (max), Pitch 0,65mm, IPC Medium Density"
  rect 2.1x0.45 smd paste+0 mask+0: 1(-3.45,4.225) 2(-3.45,3.575) 3(-3.45,2.925) 4(-3.45,2.275) 5(-3.45,1.625) 6(-3.45,0.975) 7(-3.45,0.325) 8(-3.45,-0.325) 9(-3.45,-0.975) 10(-3.45,-1.625) 11(-3.45,-2.275) 12(-3.45,-2.925) 13(-3.45,-3.575) 14(-3.45,-4.225) 15(3.45,-4.225) 16(3.45,-3.575) 17(3.45,-2.925) 18(3.45,-2.275) 19(3.45,-1.625) 20(3.45,-0.975) 21(3.45,-0.325) 22(3.45,0.325) 23(3.45,0.975) 24(3.45,1.625) 25(3.45,2.275) 26(3.45,2.925) 27(3.45,3.575) 28(3.45,4.225)
  silkscreen extent -5.32,-4.75 1.9,5.27, body extent -2.8,-5.25 2.8,5.25, height 2
TE_5103308-5 [mm]
  rect 1.398x1.398 hole 0.89 mask+0: 1(0,0)
  round 1.398 hole 0.89 mask+0: 2(0,-2.54) 3(-2.54,0) 4(-2.54,-2.54) 5(-5.08,0) 6(-5.08,-2.54) 7(-7.62,0) 8(-7.62,-2.54) 9(-10.16,0) 10(-10.16,-2.54) 11(-12.7,0) 12(-12.7,-2.54) 13(-15.24,0) 14(-15.24,-2.54) 15(-17.78,0) 16(-17.78,-2.54) 17(-20.32,0) 18(-20.32,-2.54) 19(-22.86,0) 20(-22.86,-2.54)
  silkscreen extent -27.94,-5.84 5.08,3.3, body extent -27.94,-5.84 5.08,3.3, height 9

## Part data
C80 C81 C84: library part GRM155R61C104KA88D, "CAP CER 0.1UF 16V X5R 0402", Capacitance - nF="100 nF", Capacitance - pF="100000 pF", Case Code - in=0402, Case Code - mm=1005, Dielectric=X5R, Manufacturer="Murata Electronics", Maximum Operating Temperature="+ 85 C", Minimum Operating Temperature="- 55 C", Package / Case="0402 (1005 metric)", Supplier Part Number 1=81-GRM155R61C104KA8D, Tolerance="10 %", Voltage Rating DC="16 VDC", Brand="Murata Electronics", Capacitance="0.1 uF", Category="Multilayer Ceramic Capacitors MLCC - SMD/SMT", ComponentLink1Description=http://www.mouser.com/datasheet/2/281/murata_03052018_GRM_Series_1-1310166.pdf, ComponentLink1URL=http://www.mouser.com/datasheet/2/281/murata_03052018_GRM_Series_1-1310166.pdf, Height="0.5 mm", Length="1 mm", Manufacturer Part Number=GRM155R61C104KA88D, Minimum Order Quantity=1, Packaging="Cut Tape", Pricing="1=0.082, 10=0.026, 100=0.011, 500=0.008, 1000=0.007, 2500=0.006, 5000=0.005, 10000=0.004 (EUR)", Product="General Type MLCCs", Reeling=True, RoHS="RoHS Compliant", RoHS - Mouser=Y, Series=GRM, Standard Pack Qty=10000, Stock=0, Supplier 1=Mouser, Supplier 2=Digikey, Supplier 3=Digikey, Supplier Part Number 2=490-5415-1-ND, Supplier Part Number 3=490-5415-6-ND, Termination=Standard, Termination Style=SMD/SMT, Type="Chip Multilayer Ceramic Capacitor for General Purpose", Width="0.5 mm"
C82 C83: library part CL10A475KP8NNNC, "Cap Ceramic 4.7uF 10V X5R 10% Pad SMD 0603 85C T/R", Case Code (Imperial)=0603, Case Code (Metric)=1608, Dielectric=X5R, Manufacturer=Samsung, Max Operating Temperature=85°C, Min Operating Temperature=-55°C, Package Quantity=1, Supplier Part Number 1=1276-1044-1-ND, Tolerance=10%, Voltage Rating=10V, Capacitance=4.7uF, Case/Package=0603, Category="Ceramic Capacitors", ComponentLink1Description=https://datasheet.ciiva.com/25797/cl10a475kp8nnnc-25797520.pdf?src-supplier=Digi-Key, ComponentLink1URL=https://datasheet.ciiva.com/25797/cl10a475kp8nnnc-25797520.pdf?src-supplier=Digi-Key, ComponentLink2Description=https://datasheet.ciiva.com/26838/getdatasheetpartid-358676-26838384.pdf?src-supplier=Verical, ComponentLink2URL=https://datasheet.ciiva.com/26838/getdatasheetpartid-358676-26838384.pdf?src-supplier=Verical, ComponentLink3Description=https://datasheet.ciiva.com/16318/cl05b104kq5nnnc-16318245.pdf?src-supplier=Future+Electronics, ComponentLink3URL=https://datasheet.ciiva.com/16318/cl05b104kq5nnnc-16318245.pdf?src-supplier=Future+Electronics, Contact Plating=Tin, Depth=0.8mm, Height=0.8mm, Length=1.6mm, Manufacturer Part Number=CL10A475KP8NNNC, Mount="Surface Mount", Packaging="Tape and Reel", Pricing 1="1=0.10000, 10=0.04800, 50=0.02620, 100=0.02140, 500=0.01528, 1000=0.01201 (USD)", Radiation Hardening=No, RoHS=Yes, Stock 1=1008646, Supplier 1=Digi-Key, Thickness=0.035inch, Width=0.031inch
D80: "LED GREEN/RED CLEAR CHIP SMD", Case Code (Imperial)=1210, Case Code (Metric)=3225, Color=Green,Red, Forward Current=30mA, Forward Voltage=2V, Lens Color=Colorless, Manufacturer="Vishay Lite-On", Max Operating Temperature=85°C, Max Power Dissipation=75mW, Min Operating Temperature=-55°C, Package Quantity=1, Reverse Voltage=5V, Supplier Part Number 1=160-1409-1-ND, Test Current=20mA, Case/Package=1210, Category=LEDs, ComponentLink1Description=https://datasheet.ciiva.com/11774/0900766b80dc0273-11774195.pdf?src-supplier=RSComponents, ComponentLink1URL=https://datasheet.ciiva.com/11774/0900766b80dc0273-11774195.pdf?src-supplier=RSComponents, ComponentLink2Description=https://datasheet.ciiva.com/15117/getdatasheetpartid-103641-15117440.pdf?src-supplier=Verical, ComponentLink2URL=https://datasheet.ciiva.com/15117/getdatasheetpartid-103641-15117440.pdf?src-supplier=Verical, ComponentLink3Description=https://datasheet.ciiva.com/16366/lite-on20ltst-c155kgjrkt-16366147.pdf?src-supplier=Future+Electronics, ComponentLink3URL=https://datasheet.ciiva.com/16366/lite-on20ltst-c155kgjrkt-16366147.pdf?src-supplier=Future+Electronics, ComponentLink4Description=https://datasheet.ciiva.com/27051/1260277-27051786.pdf?src-supplier=Jameco, ComponentLink4URL=https://datasheet.ciiva.com/27051/1260277-27051786.pdf?src-supplier=Jameco, ComponentLink5Description=https://datasheet.ciiva.com/2110/s-110-ltst-c155kgjrkt-2110800.pdf?src-supplier=Digi-Key, ComponentLink5URL=https://datasheet.ciiva.com/2110/s-110-ltst-c155kgjrkt-2110800.pdf?src-supplier=Digi-Key, ComponentLink6Description=https://datasheet.ciiva.com/2110/s-110-ltst-c155kgjrkt-2110801.pdf?src-supplier=Digi-Key, ComponentLink6URL=https://datasheet.ciiva.com/2110/s-110-ltst-c155kgjrkt-2110801.pdf?src-supplier=Digi-Key, Depth=3.2mm, Dominant Wavelength=631nm, Height=1.1mm, Illumination Color=Green,Red, Lead Free="Lead Free", Length=2.7mm, Lens Style=Diffused,Colorless,Rectangular,Clear, Lens Transparency=Clear, Luminous Intensity=45mcd, Manufacturer Part Number=LTST-C155KGJRKT, Mount="Surface Mount", Number of Elements=2, Number of LEDs=2, Number of Pins=4, Packaging="Tape and Reel", Power Dissipation=75mW, Power Rating=75mW, Pricing 1="1=0.43000, 10=0.28000, 100=0.18670, 500=0.12912, 1000=0.10760 (USD)", Radiation Hardening=No, RoHS=Yes, Stock 1=123598, Supplier 1=Digi-Key, Viewing Angle=130°, Wavelength=639nm, Width=2.7mm
D81: "DIODE SCHOTTKY 40V 1A SOD123L", Capacitance @ Vr, F=-, Current - Average Rectified (Io)=1A, Current - Reverse Leakage @ Vr="500µA @ 40V", Manufacturer="ON Semiconductor", Operating Temperature - Junction="-55°C ~ 125°C", Package / Case=SOD-123F, Supplier Device Package=SOD-123L, Supplier Part Number 1=MBR140SFT1GOSDKR-ND, Voltage - DC Reverse (Vr) (Max)=40V, Voltage - Forward (Vf) (Max) @ If="550mV @ 1A", Category="Discrete Semiconductor Products", ComponentLink1Description=http://www.onsemi.com/pub_link/Collateral/MBR140SFT1-D.PDF, ComponentLink1URL=http://www.onsemi.com/pub_link/Collateral/MBR140SFT1-D.PDF, Diode Type=Schottky, Manufacturer Part Number=MBR140SFT1G, Mounting Type="Surface Mount", Packaging=Digi-Reel®, Part Status=Active, Pricing 1="1=0.3, 10=0.23, 100=0.1431, 500=0.09782, 1000=0.07519 (GBP)", Reverse Recovery Time (trr)=-, RoHS="RoHS Compliant", Speed="Fast Recovery =< 500ns, > 200mA (Io)", Stock 1=29983, Supplier 1=Digi-Key
FB80: "FERRITE BEAD 600 OHM 0402 1LN", Case Code (Imperial)=0402, Case Code (Metric)=1005, Current Rating=300mA, DC Resistance (DCR)=520mR, Frequency=100MHz, Manufacturer=Murata, Max Operating Temperature=125°C, Min Operating Temperature=-55°C, Package Quantity=10000, Supplier Part Number 1=490-1006-1-ND, Tolerance=25%, Case/Package=0402, Category=Inductors, ComponentLink1Description=https://datasheet.ciiva.com/11799/0900766b811b5866-11799226.pdf?src-supplier=RSComponents, ComponentLink1URL=https://datasheet.ciiva.com/11799/0900766b811b5866-11799226.pdf?src-supplier=RSComponents, ComponentLink2Description=https://datasheet.ciiva.com/29347/442210-da-01-en-chip-drossel-0402-600r-300ma-1-0x0-5mm-29347879.pdf?src-supplier=Conrad, ComponentLink2URL=https://datasheet.ciiva.com/29347/442210-da-01-en-chip-drossel-0402-600r-300ma-1-0x0-5mm-29347879.pdf?src-supplier=Conrad, ComponentLink3Description=https://datasheet.ciiva.com/41449/001172163-da-01-en-drossel-0402-600r-1-0x0-5mm-10000st-41449450.pdf?src-supplier=Conrad, ComponentLink3URL=https://datasheet.ciiva.com/41449/001172163-da-01-en-drossel-0402-600r-1-0x0-5mm-10000st-41449450.pdf?src-supplier=Conrad, ComponentLink4Description=https://datasheet.ciiva.com/6212/l0110s0100blm15ag-sn-6212565.pdf?src-supplier=Digi-Key, ComponentLink4URL=https://datasheet.ciiva.com/6212/l0110s0100blm15ag-sn-6212565.pdf?src-supplier=Digi-Key, ComponentLink5Description=https://datasheet.ciiva.com/6212/l0110s0100blm15ag-sn-6212519.pdf?src-supplier=Digi-Key, ComponentLink5URL=https://datasheet.ciiva.com/6212/l0110s0100blm15ag-sn-6212519.pdf?src-supplier=Digi-Key, ComponentLink6Description=https://datasheet.ciiva.com/1466/5144-1466744.pdf?src-supplier=Element14, ComponentLink6URL=https://datasheet.ciiva.com/1466/5144-1466744.pdf?src-supplier=Element14, ComponentLink7Description=https://datasheet.ciiva.com/6212/l0110s0100blm15ag-sn-6212520.pdf?src-supplier=Digi-Key, ComponentLink7URL=https://datasheet.ciiva.com/6212/l0110s0100blm15ag-sn-6212520.pdf?src-supplier=Digi-Key, ComponentLink8Description=https://datasheet.ciiva.com/1466/5144-1466745.pdf?src-supplier=Element14, ComponentLink8URL=https://datasheet.ciiva.com/1466/5144-1466745.pdf?src-supplier=Element14, ComponentLink9Description=https://datasheet.ciiva.com/8510/l0110s0100blm15ag-sn-8510909.pdf?src-supplier=Avnet, ComponentLink9URL=https://datasheet.ciiva.com/8510/l0110s0100blm15ag-sn-8510909.pdf?src-supplier=Avnet, ComponentLink10Description=https://datasheet.ciiva.com/14122/blm-series-eng-tds-14122894.pdf?src-supplier=Distrelec, ComponentLink10URL=https://datasheet.ciiva.com/14122/blm-series-eng-tds-14122894.pdf?src-supplier=Distrelec, ComponentLink11Description=https://datasheet.ciiva.com/8084/l0110s0100blm15ag-sn-8084271.pdf?src-supplier=Avnet, ComponentLink11URL=https://datasheet.ciiva.com/8084/l0110s0100blm15ag-sn-8084271.pdf?src-supplier=Avnet, Core Material=Ferrite, DC Current=300mA, Depth=0.55mm, Height=0.5mm, Impedance=600R, Lead Free="Lead Free", Length=1mm, Manufacturer Part Number=BLM15AG601SN1D, Material=Steel,Ferrite, Max Current Rating=300mA, Max DC Current=300mA, Military Standard=Not, Number of Circuits=1, Number of Lines=1, Number of Pins=2, Packaging="Tape and Reel", Pricing 1="1=0.10000, 10=0.07600, 25=0.06960, 50=0.06260, 100=0.04590, 250=0.03336, 500=0.03058, 1000=0.02641, 5000=0.02085 (USD)", Radiation Hardening=No, REACH SVHC="No SVHC", RoHS=Yes, Shielding=Unshielded, Stock 1=436370, Supplier 1=Digi-Key, Termination=SMD/SMT, Test Frequency=100MHz, Width=0.5mm
JLINK80A JLINK80B: "Header; Pin; Vertical; Copper Alloy; Thermoplastic; 20; 0.100 x 0.100 in.; 1 A", Manufacturer="AMP - TE CONNECTIVITY", Supplier Part Number 1=A33165-ND, Category="Headers and Wire Housings", ComponentLink1Description=http://catalog.tycoelectronics.com/TE/bin/TE.Connect?C=1&M=BYPN&TCPN=5103308-5&RQPN=5103308-5&src-supplier=Farnell, ComponentLink1URL=http://catalog.tycoelectronics.com/TE/bin/TE.Connect?C=1&M=BYPN&TCPN=5103308-5&RQPN=5103308-5&src-supplier=Farnell, ComponentLink2Description=http://catalog.tycoelectronics.com/TE/bin/TE.Connect?C=1&M=BYPN&TCPN=5103308-5&RQPN=5103308-5&src-supplier=Newark, ComponentLink2URL=http://catalog.tycoelectronics.com/TE/bin/TE.Connect?C=1&M=BYPN&TCPN=5103308-5&RQPN=5103308-5&src-supplier=Newark, ComponentLink3Description=https://www.te.com/commerce/DocumentDelivery/DDEController?Action=srchrtrv&DocNm=5103308&DocType=Customer+Drawing&DocLang=English&src-supplier=Digi-Key, ComponentLink3URL=https://www.te.com/commerce/DocumentDelivery/DDEController?Action=srchrtrv&DocNm=5103308&DocType=Customer+Drawing&DocLang=English&src-supplier=Digi-Key, Manufacturer Part Number=5103308-5, Pricing 1="1=2.15000, 10=1.94800, 100=1.66990, 500=1.39158, 1000=1.19279, 5000=1.05760, 10000=1.03375 (USD)", RoHS=No, Stock 1=6694, Supplier 1=Digi-Key
P80: "Conn FFC/FPC Connector SKT 11 POS 0.3mm Solder RA SMD Easy-On™ T/R", Manufacturer=Molex, Supplier Part Number=538-504754-1100, Checked=FALSE, ComponentLink1Description=https://datasheet.octopart.com/504754-1100-Molex-datasheet-169278456.pdf?src-supplier=Farnell, ComponentLink1URL=https://datasheet.octopart.com/504754-1100-Molex-datasheet-169278456.pdf?src-supplier=Farnell, ComponentLink2Description=http://datasheet.octopart.com/5047541100-Molex-datasheet-38188796.pdf?src-supplier=Onlinecomponents.com, ComponentLink2URL=http://datasheet.octopart.com/5047541100-Molex-datasheet-38188796.pdf?src-supplier=Onlinecomponents.com, ComponentLink3Description=http://datasheet.octopart.com/5047541100-Molex-datasheet-38188796.pdf?src-supplier=Verical, ComponentLink3URL=http://datasheet.octopart.com/5047541100-Molex-datasheet-38188796.pdf?src-supplier=Verical, ComponentLink4Description=http://datasheet.octopart.com/5047541100-Molex-datasheet-38188796.pdf?src-supplier=Avnet, ComponentLink4URL=http://datasheet.octopart.com/5047541100-Molex-datasheet-38188796.pdf?src-supplier=Avnet, ComponentLink5Description=http://datasheet.octopart.com/5047541100-Molex-datasheet-38188796.pdf?src-supplier=TTI, ComponentLink5URL=http://datasheet.octopart.com/5047541100-Molex-datasheet-38188796.pdf?src-supplier=TTI, ComponentLink6Description=http://datasheet.octopart.com/5047541100-Molex-datasheet-38188796.pdf?src-supplier=Electro+Sonic, ComponentLink6URL=http://datasheet.octopart.com/5047541100-Molex-datasheet-38188796.pdf?src-supplier=Electro+Sonic, ComponentLink7Description=https://datasheet.octopart.com/504754-1100-Molex-datasheet-154754160.pdf?src-supplier=Master+Electronics, ComponentLink7URL=https://datasheet.octopart.com/504754-1100-Molex-datasheet-154754160.pdf?src-supplier=Master+Electronics, Manufacturer Part Number=504754-1100, Pricing="1=0.77, 10=0.628, 50=0.544, 100=0.512, 1000=0.426, 10000=0.355 (USD)", RoHS=No, Stock=6459, Supplier=Mouser, Supplier 1=Mouser, Supplier Part Number 1=538-504754-1100, System=Connector
R80A R80B R81A R81B: library part ERJ-2RKF1002X, "RES SMD 10K OHM 1% 1/10W 0402", Manufacturer="Panasonic Electronic Components", Operating Temperature="-55°C ~ 155°C", Package / Case="0402 (1005 Metric)", Power (Watts)="0.1W, 1/10W", Resistance (Ohms)=10k, Supplier Device Package=0402, Supplier Part Number 1=P10.0KLDKR-ND, Temperature Coefficient=±100ppm/°C, Tolerance=±1%, Category=Resistors, ComponentLink1Description=https://industrial.panasonic.com/cdbs/www-data/pdf/RDA0000/AOA0000C283.pdf, ComponentLink1URL=https://industrial.panasonic.com/cdbs/www-data/pdf/RDA0000/AOA0000C283.pdf, Composition="Thick Film", Failure Rate=-, Features="Automotive AEC-Q200", Height - Seated (Max)="0.016\" (0.40mm)", Manufacturer Part Number=ERJ-2RKF1002X, Number of Terminations=2, Packaging=Digi-Reel®, Part Status=Active, Pricing 1="1=0.1, 10=0.025, 25=0.018, 50=0.0136, 100=0.01, 250=0.00764, 500=0.00612, 1000=0.00451, 5000=0.00323 (USD)", RoHS="RoHS Compliant", Size / Dimension="0.039\" L x 0.020\" W (1.00mm x 0.50mm)", Stock 1=8105773, Supplier 1=Digi-Key
R82 R83: library part ERJ-2RKF1000X, "RES SMD 100 OHM 1% 1/10W 0402", Manufacturer="Panasonic Electronic Components", Operating Temperature="-55°C ~ 155°C", Package / Case="0402 (1005 Metric)", Power (Watts)="0.1W, 1/10W", Resistance (Ohms)=100, Supplier Device Package=0402, Supplier Part Number 1=P100LDKR-ND, Temperature Coefficient=±100ppm/°C, Tolerance=±1%, Category=Resistors, ComponentLink1Description=https://industrial.panasonic.com/cdbs/www-data/pdf/RDA0000/AOA0000C283.pdf, ComponentLink1URL=https://industrial.panasonic.com/cdbs/www-data/pdf/RDA0000/AOA0000C283.pdf, Composition="Thick Film", Failure Rate=-, Features="Automotive AEC-Q200", Height - Seated (Max)="0.016\" (0.40mm)", Manufacturer Part Number=ERJ-2RKF1000X, Number of Terminations=2, Packaging=Digi-Reel®, Part Status=Active, Pricing 1="1=0.1, 10=0.025, 25=0.018, 50=0.0136, 100=0.01, 250=0.00764, 500=0.00612, 1000=0.00451, 5000=0.00323 (USD)", RoHS="RoHS Compliant", Size / Dimension="0.039\" L x 0.020\" W (1.00mm x 0.50mm)", Stock 1=1714577, Supplier 1=Digi-Key
R84 R85: library part ERJ-2RKF5101X, "RES SMD 5.1K OHM 1% 1/10W 0402", Case Code (Imperial)=0402, Case Code (Metric)=1005, Manufacturer=Panasonic, Max Operating Temperature=155°C, Max Power Dissipation=100mW, Min Operating Temperature=-55°C, Package Quantity=10000, Resistance Tolerance=1%, Resistor Type="Thick Film", Supplier Part Number=667-ERJ-2RKF5101X, Temperature Coefficient=100ppm/°C, Voltage Rating=50V, Case/Package=0402, Category="Chip SMD Resistors", ComponentLink1Description=https://datasheet.ciiva.com/11821/0900766b80f80784-11821351.pdf?src-supplier=Rs, ComponentLink1URL=https://datasheet.ciiva.com/11821/0900766b80f80784-11821351.pdf?src-supplier=Rs, ComponentLink2Description=https://datasheet.ciiva.com/43467/1678782-43467375.pdf?src-supplier=Farnell, ComponentLink2URL=https://datasheet.ciiva.com/43467/1678782-43467375.pdf?src-supplier=Farnell, ComponentLink3Description=https://datasheet.ciiva.com/16761/70260748-16761739.pdf?src-supplier=Allied+Electronics, ComponentLink3URL=https://datasheet.ciiva.com/16761/70260748-16761739.pdf?src-supplier=Allied+Electronics, ComponentLink4Description=https://datasheet.ciiva.com/16788/70260748-16788554.pdf?src-supplier=Allied+Electronics, ComponentLink4URL=https://datasheet.ciiva.com/16788/70260748-16788554.pdf?src-supplier=Allied+Electronics, ComponentLink5Description=https://datasheet.ciiva.com/9195/aoa0000ce2-9195580.pdf?src-supplier=Avnet, ComponentLink5URL=https://datasheet.ciiva.com/9195/aoa0000ce2-9195580.pdf?src-supplier=Avnet, Construction=Rectangular, Contact Plating=Tin, Depth=0.5mm, Height=0.35mm, Lead Free=5697LeadFree, Length=1mm, Manufacturer Part Number=ERJ-2RKF5101X, Military Standard=Not, Mounting Technology="Surface Mount", Number of Terminations=2, Packaging="Tape and Reel", Power Rating=100mW, Pricing="1=0.1, 10=0.016, 50=0.016, 100=0.009, 1000=0.007, 10000=0.004 (USD)", Reach SVHC Compliant=No, RoHS=Yes, RoHS Compliant=Yes, Series=ERJ, Stock=709989, Supplier=Mouser, Supplier 1=Mouser, Supplier Part Number 1=667-ERJ-2RKF5101X, Technology="THICK FILM", Termination=SMD/SMT, Tolerance=1%, Voltage Rating (DC)=50V, Weight=2.8E-05oz, Width=0.5mm
RST80A RST80B: "SWITCH TACTILE SPST-NO 0.05A 12V", Contact Rating @ Voltage="0.05A @ 12VDC", Illumination Type, Color=-, Manufacturer="Omron Electronics Inc-EMC Div", Operating Force=153gf, Operating Temperature="-25°C ~ 70°C", Supplier Part Number 1=SW1020DKR-ND, Actuator Height off PCB, from Pins=1.60mm, Actuator Material=-, Actuator Orientation="Top Actuated", Actuator Type=Standard, Category=Switches, Circuit=SPST-NO, ComponentLink1Description=http://www.omron.com/ecb/products/pdf/en-b3u.pdf, ComponentLink1URL=http://www.omron.com/ecb/products/pdf/en-b3u.pdf, Features=-, Illumination=Non-Illuminated, Illumination Voltage (Nominal)=-, Ingress Protection="Dust Proof", Manufacturer Part Number=B3U-1000P, Mechanical Life="200,000 Cycles", Mounting Type="Surface Mount", Outline="3.00mm x 2.50mm", Packaging=Digi-Reel®, Part Status=Active, Pricing 1="1=0.93, 10=0.898, 25=0.8468, 50=0.745, 100=0.6774, 250=0.64348, 500=0.62656, 1000=0.49108 (GBP)", RoHS="RoHS Compliant", Stock 1=66079, Supplier 1=Digi-Key, Switch Function=Off-Mom, Switch Travel=0.15mm, Termination Style="SMD (SMT) Tab"
SWD80A SWD80B: "Headers & Wire Housings Tiger Buy Socket Strip with Square Tails, 0.100 Pitch", Manufacturer=Samtec, Supplier Part Number=SSQ-106-23-F-S-ND, Category="Headers and Wire Housings", ComponentLink1Description=ftp://ftp.samtec.com/webfiles/PDF/SSQ_TH.PDF?src-supplier=Avnet, ComponentLink1URL=ftp://ftp.samtec.com/webfiles/PDF/SSQ_TH.PDF?src-supplier=Avnet, Contact Material=Bronze, Contact Plating=Gold, Gender=Receptacle, Lead Free="Lead Free", Manufacturer Part Number=SSQ-106-23-F-S, Mounting Technology="Through Hole", Number of Contacts=6, Number of Rows=1, Packaging=Bulk, Pitch=2.54mm, Pricing="1=1.54, 50=1.2, 100=0.97, 500=0.82, 1000=0.775 (USD)", Radiation Hardening=No, Reach SVHC Compliant=No, RoHS=Yes, RoHS Compliant=Yes, Series=SSQ, Stock=84, Supplier=Digikey, Supplier 1=Digikey, Supplier Part Number 1=SSQ-106-23-F-S-ND, Termination=Solder
U80: "IC USB FS SERIAL UART 28-SSOP", Manufacturer="FTDI, Future Technology Devices International Ltd", Manufacturer Part Number=FT232RL-REEL, Package / Case="28-SSOP (0.209\", 5.30mm Width)", Supplier Device Package=28-SSOP, Supplier Part Number 1=768-1007-6-ND, Voltage - Supply="3.3 V ~ 5.25 V", Category="Integrated Circuits (ICs)", ComponentLink1Description=http://www.ftdichip.com/Support/Documents/DataSheets/ICs/DS_FT232R.pdf, ComponentLink1URL=http://www.ftdichip.com/Support/Documents/DataSheets/ICs/DS_FT232R.pdf, Features="USB to UART", FIFO's="256 Byte", Mounting Type="Surface Mount", Number of Channels="1, UART", Packaging=Digi-Reel®, Pricing 1="1=3.54, 10=3.185, 50=3.028, 100=2.8707, 250=2.55612, 500=2.24152 (EUR)", Protocol="RS-232, RS-422, RS-485", RoHS="RoHS Compliant", Stock 1=34727, Supplier 1=Digikey, Supplier 2=Farnell, Supplier Part Number 2=1146032RL, With Auto Flow Control=Yes, With CMOS=Yes, With False Start Bit Detection=-, With IrDA Encoder/Decoder=-, With Modem Control=Yes, With Parallel Port=-
USB80: "Cut Tape - Usb Type C Receptacle Mid Mnt Dual R", Current Rating=5A, Insulation Color=Black, Manufacturer="JAE Electronics", Max Operating Temperature=80°C, Min Operating Temperature=-30°C, Supplier Part Number 1=656-DX07S024JJ3R1300, Voltage Rating=20V, Category="USB Connectors", ComponentLink1Description=http://www.alliedelec.com/m/d/e03b7b5d71e2d3e369c52d5c8eaca2b6.pdf?src-supplier=Allied+Electronics, ComponentLink1URL=http://www.alliedelec.com/m/d/e03b7b5d71e2d3e369c52d5c8eaca2b6.pdf?src-supplier=Allied+Electronics, ComponentLink2Description=http://www.jae.com/z-en/pdf_download_exec.cfm?param=SJ115995.pdf&src-supplier=Digikey, ComponentLink2URL=http://www.jae.com/z-en/pdf_download_exec.cfm?param=SJ115995.pdf&src-supplier=Digikey, Connector Type=USB, Contact Material=153,157ConductorMaterial, Contact Plating=Gold, Gender=Receptacle, Height=3.29mm, Manufacturer Part Number=DX07S024JJ3R1300, Mating Cycles=10000, Mounting Technology="Surface Mount,Through Hole,Horizontal", Number of Contacts=24, Number of Ports=1, Packaging="Cut Tape", Pricing="1=1.78, 10=1.612, 25=1.5272, 50=1.4916, 100=1.4205, 250=1.25048 (USD)", RoHS=Yes, RoHS Compliant=Yes, Series=DX07, Shielding=Shielded, Stock=21875, Supplier 1=Mouser, Supplier 2=Digikey, Supplier Part Number 2=670-2846-1-ND, Termination=Solder

## Via types
v1: diameter 0.35, hole 0.15, L1 to L4, tented both sides, 32 vias

## Nets (pads, with @x,y where several pads share a name; then routed paths per layer and width w, separated by ;. In a path a pad name is that pad's centre, name@x,y a point inside that pad or via, vN(x,y) a via of type N, cw(c..) or ccw(c..) an arc to the next point about the centre after c; other vN are vias at no path point)
1V8: C81.2 JLINK80A.1 JLINK80A.2 JLINK80B.1 JLINK80B.2 P80.11 R80A.2 R80B.2 R81A.2 R81B.2 SWD80A.1 SWD80B.1 U80.4 | length 6.6
  L1 w0.2: C81.2 v1(24.925,22.675)
  L4 w0.2: P80.11 v1@2.875,19 ; v1(9.775,18.19) R81A.2 ; R81B.2 v1@11.225,16.02 ; v1(12.225,18.19) R80A.2 ; R80B.2 v1(13.82,16.02) v1@13.825,16.025 ; U80.4 v1(24.925,22.675)
  other v1: 11.225,16 2.825,19
CC1_4: R84.1 USB80.A5 | length 5.5
  L1 w0.1: USB80.A5 v1@34.243,16.875
  L4 w0.1: v1(34.285,16.85) 36.775,16.85 37.875,15.75 R84.1
CC2_4: R85.1 USB80.B5 | length 4.6
  L1 w0.1: USB80.B5 37.325,18.125 37.95,17.5 v1(37.95,16.65)
  L4 w0.1: v1(37.95,16.65) R85.1
CHG_AC: D81.1 P80.1 | length 3.5
  L4 w0.2: P80.1 2.85,16 3.05,15.8 3.05,13.85 D81.1
D_4_N: U80.16 USB80.A7 USB80.B7 | length 8.4
  L1 w0.1: v1(30.775,15.625) 30.775,17.625 31.025,17.875 USB80.A7 33.89,17.875 34.64,17.125 USB80.B7
  L4 w0.2: U80.16 v1(30.775,15.625)
D_4_P: U80.15 USB80.A6 USB80.B6 | length 9.2
  L1 w0.1: v1(31.425,15.625) 31.425,17.025 31.775,17.375 v1(32.7,17.375) USB80.A6 ; USB80.B6 v1(35.875,17.625)
  L4 w0.1: v1(32.7,17.375) 35.625,17.375 v1(35.875,17.625)
  L4 w0.2: U80.15 v1(31.425,15.625)
GND: C80.2 C81.1 C82.1 C83.1 C84.2 FB80.1 JLINK80A.4 JLINK80A.6 JLINK80A.8 JLINK80A.10 JLINK80A.11 JLINK80A.12 JLINK80A.14 JLINK80A.16 JLINK80A.18 JLINK80A.20 JLINK80B.4 JLINK80B.6 JLINK80B.8 JLINK80B.10 JLINK80B.11 JLINK80B.12 JLINK80B.14 JLINK80B.16 JLINK80B.18 JLINK80B.20 P80.5 R84.2 R85.2 RST80A.2 RST80B.2 SWD80A.3 SWD80B.3 U80.7 U80.18 U80.21 U80.25 U80.26 USB80.A1 USB80.A12 USB80.B1 USB80.B12 | length 24.1
  L1 w0.2: v1@3.7,23.675 RST80A.2 ; v1(3.8,8.55) RST80B.2 ; C81.1 26.7,20.325 26.88,20.145 v1(26.88,19.375) ; v1(27.525,12.475) 27.525,12.477 27.775,12.727 C80.2 ; C84.2 28.775,15.125 29.246,15.596 29.471,15.596 v1(29.5,15.625) ; USB80.A1 34.2,14.875 34.45,14.625 USB80.B12 v1(35.875,14.625) ; USB80.A12 34.25,20.375 34.5,20.125 USB80.B1 v1(35.875,20.125)
  L4 w0.2: P80.5@2.115,17.2 2.525,17.2 v1(2.825,17.5) ; v1@24.275,12.475 U80.26 U80.25 ; U80.7 26.878,20.948 26.878,19.377 v1(26.88,19.375) ; v1(27.525,12.475) U80.21 ; U80.18 v1@29.475,15.575 ; v1@39.125,19.05 C82.1 ; v1(39.175,15.75) R84.2 ; v1@39.175,17.88 C83.1 ; FB80.1 39.692,14.918 39.692,15.732 R84.2 ; R85.2 R84.2
  other v1: 24.25,12.475 39.175,17.85 39.175,19.05 3.675,23.675
MCU_R\E\S\E\T\: JLINK80A.15 P80.6 R81A.1 RST80A.1 SWD80A.5 | length 31.6
  L1 w0.1: v1(3.625,20.45) 3.625,21.225 RST80A.1 ; SWD80A.5 10.49,31.065 11.5,32.075 16.275,32.075 16.72,31.63 JLINK80A.15
  L4 w0.1: P80.6 3.925,17.5 3.625,17.8 v1(3.625,20.45) 10.44,20.45 10.49,20.5 ; R81A.1 10.49,19.255 10.49,20.5 ; SWD80A.5 10.49,20.5
MCU_RX: P80.10 U80.5 | length 24
  L4 w0.1: P80.10 8.175,18.7 8.525,18.35 8.525,17.8 8.575,17.8 8.8,17.575 22.725,17.575 23.275,18.125 23.275,18.875 23.775,19.375 25.275,19.375 25.575,19.675 U80.5
MCU_SWD_CLK: JLINK80A.9 P80.7 SWD80A.2 | length 47.9
  L1 w0.1: SWD80A.2 18.11,28.56 18.65,29.1 27.35,29.1 27.925,29.675 27.925,31.675 27.525,32.075 24.65,32.075 24.34,31.765 JLINK80A.9
  L4 w0.1: P80.7@2.115,17.8 1.8,17.8 1.55,18.05 1.55,20.9 1.95,21.3 4.875,21.3 5.05,21.475 5.05,23.225 5.65,23.825 17.725,23.825 18.11,23.44 SWD80A.2
MCU_SWD_IO: JLINK80A.7 P80.9 R80A.1 SWD80A.4 | length 41.3
  L1 w0.1: SWD80A.4 13.03,28.705 13.775,29.45 25.79,29.45 JLINK80A.7
  L4 w0.1: P80.9 1.925,18.4 1.75,18.575 1.75,20.6 2.075,20.925 5.1,20.925 5.479,21.304 5.479,22.904 5.95,23.375 12.7,23.375 13.031,23.044 13.031,22.001 SWD80A.4 13.03,19.255 R80A.1
MCU_TX: P80.8 U80.1 | length 23.9
  L4 w0.1: P80.8 4.475,18.1 4.3,18.275 4.3,18.95 4.475,19.125 8.525,19.125 8.85,18.8 8.85,18.025 9.075,17.8 22.25,17.8 22.975,18.525 U80.1
MPU_R\E\S\E\T\: JLINK80B.15 P80.4 R81B.1 RST80B.1 SWD80B.5 | length 27.3
  L1 w0.1: v1(3.725,15.1) 3.725,13.275 RST80B.1 ; SWD80B.5@10.35,12.3 10.35,6.575 11.2,5.725 16.1,5.725 16.109,5.716 16.505,6.113 JLINK80B.15
  L4 w0.1: P80.4@4.735,16.9 4.1,16.9 3.725,16.525 v1(3.725,15.1) 10.395,15.1 R81B.1 ; SWD80B.5 R81B.1@10.49,14.995
MPU_SWD_CLK: JLINK80B.9 P80.2 SWD80B.2 | length 27.7
  L1 w0.1: SWD80B.2@17.97,12.3 17.875,12.205 17.875,9.075 18.3,8.65 22.475,8.65 JLINK80B.9
  L4 w0.1: P80.2 6.5,16.3 6.8,16.6 13.425,16.6 13.45,16.575 17.555,16.575 18.11,16.02 SWD80B.2 ; SWD80B.2@17.925,12.345 SWD80B.2@17.97,12.3
MPU_SWD_DIO: JLINK80B.7 P80.3 R80B.1 SWD80B.4 | length 38.2
  L1 w0.1: SWD80B.4@12.89,12.3 12.89,8.835 13.45,8.275 22.225,8.275 22.825,7.675 22.825,6.2 23.325,5.7 25.365,5.7 JLINK80B.7
  L4 w0.1: P80.3 2.975,16.6 3.375,16.2 3.375,14.725 3.625,14.475 8.95,14.475 9.15,14.275 9.15,11.85 9.775,11.225 11.815,11.225 SWD80B.4@12.89,12.3 ; R80B.1 13.03,14.97 SWD80B.4
NetC84_1: C84.1 U80.17 | length 4.5
  L1 w0.2: C84.1 29.875,14.125 30.15,13.85 v1(30.15,12.475)
  L4 w0.2: U80.17 30.137,14.038 30.137,12.488 v1(30.15,12.475)
NetD80_3: D80.3 R83.1 | length 4.4
  L1 w0.2: D80.3 26.555,18.2 26.9,17.855 R83.1
NetD80_4: D80.4 R82.1 | length 2
  L1 w0.2: D80.4 25.375,15.72 25.975,15.12 R82.1
NetFB80_2: FB80.2 USB80.S1 USB80.S2 USB80.S3 USB80.S4 | length 21.7
  L4 w0.2: FB80.2 38.775,14.5 39.325,13.95 USB80.S3
  L4 w0.3: USB80.S2@34.275,21.82 USB80.S4 39.705,21.82 40.525,21 40.525,13.931 39.774,13.18 USB80.S3 35.2,13.18 USB80.S1@34.875,13.505
NetR82_2: R82.2 U80.23 | length 3.3
  L1 w0.2: R82.2 26.05,13.355 26.225,13.18 v1(26.225,12.475)
  L4 w0.2: v1(26.225,12.475) U80.23
NetR83_2: R83.2 U80.22 | length 3.2
  L1 w0.2: v1(26.88,12.475) 26.89,12.485 26.89,14.09 R83.2
  L4 w0.2: U80.22 26.875,12.48 v1(26.88,12.475)
NetU80_3: U80.3
NetU80_11: U80.11
SWOA: JLINK80A.13 SWD80A.6 | length 22.3
  L1 w0.1: SWD80A.6 7.95,31.15 9.075,32.275 18.575,32.275 19.26,31.59 JLINK80A.13
SWOB: JLINK80B.13 SWD80B.6 | length 18
  L1 w0.1: SWD80B.6@7.81,12.3 7.81,6.765 9.1,5.475 17.6,5.475 19.045,6.92 JLINK80B.13
VBUS_UART: C80.1 C82.2 C83.2 D80.1 D80.2 D81.2 U80.20 USB80.A4 USB80.A9 USB80.B4 USB80.B9 | length 52.5
  L1 w0.2: C80.1 v1(27.775,15.875) 27.804,15.904 27.804,15.979 28.625,16.8 D80.2 D80.1 29.275,18.6 31.238,18.6 31.512,18.875 v1(32.7,18.875) USB80.A9 34.25,18.875 34.5,18.625 USB80.B4 ; v1(32.7,16.375) USB80.A4 34.26,16.375 34.51,16.125 USB80.B9
  L4 w0.2: D81.2@3.35,10.6 27.325,10.6 28.175,11.45 U80.20 28.175,15.475 v1(27.775,15.875) ; v1(32.7,16.375) 32.2,16.875 32.2,18.375 v1(32.7,18.875) 38.1,18.875 C82.2 38.3,19.025 C83.2
pads on no net: JLINK80A.3 JLINK80A.5 JLINK80A.17 JLINK80A.19 JLINK80B.3 JLINK80B.5 JLINK80B.17 JLINK80B.19 P80.P1 P80.P2 U80.2 U80.6 U80.8 U80.9 U80.10 U80.12 U80.13 U80.14 U80.19 U80.24 U80.27 U80.28 USB80. USB80.A2 USB80.A3 USB80.A8 USB80.A10 USB80.A11 USB80.B2 USB80.B3 USB80.B8 USB80.B10 USB80.B11

## Polygon pours and split planes (outlines as drawn)
GND on L2 (GND) "GND_L02_P021" (solid, remove dead copper, pour order 21): 1,35 41,35 41,0 1,0
1V8 on L3 (VDD) "1V8_L03_P022" (solid, remove dead copper, pour order 22): 1,35 41,35 41,0 1,0

## Other copper
L1:
  region net NetFB80_2: 35.425,13.18 35.425,13.8 ccw(c34.888,13.68) 34.888,14.23 ccw(c34.888,13.697) 34.875,14.23 ccw(c34.866,13.68) 34.325,13.78 33.725,13.78 ccw(c33.725,13.18) 33.125,13.18 ccw(c33.725,13.18) 33.725,12.58 34.825,12.58 ccw(c34.825,13.18)
  region net NetFB80_2: 34.888,20.77 ccw(c34.888,21.32) 35.425,21.2 35.425,21.82 ccw(c34.825,21.82) 34.825,22.42 33.725,22.42 ccw(c33.725,21.82) 33.725,21.22 34.325,21.22 ccw(c34.866,21.32) 34.875,20.77 ccw(c34.888,21.321)
L2 (GND):
  region net NetFB80_2: 35.425,13.18 35.425,13.8 ccw(c34.888,13.68) 34.888,14.23 ccw(c34.888,13.697) 34.875,14.23 ccw(c34.866,13.68) 34.325,13.78 33.725,13.78 ccw(c33.725,13.18) 33.125,13.18 ccw(c33.725,13.18) 33.725,12.58 34.825,12.58 ccw(c34.825,13.18)
  region net NetFB80_2: 34.888,20.77 ccw(c34.888,21.32) 35.425,21.2 35.425,21.82 ccw(c34.825,21.82) 34.825,22.42 33.725,22.42 ccw(c33.725,21.82) 33.725,21.22 34.325,21.22 ccw(c34.866,21.32) 34.875,20.77 ccw(c34.888,21.321)
L3 (VDD):
  region net NetFB80_2: 35.425,13.18 35.425,13.8 ccw(c34.888,13.68) 34.888,14.23 ccw(c34.888,13.697) 34.875,14.23 ccw(c34.866,13.68) 34.325,13.78 33.725,13.78 ccw(c33.725,13.18) 33.125,13.18 ccw(c33.725,13.18) 33.725,12.58 34.825,12.58 ccw(c34.825,13.18)
  region net NetFB80_2: 34.888,20.77 ccw(c34.888,21.32) 35.425,21.2 35.425,21.82 ccw(c34.825,21.82) 34.825,22.42 33.725,22.42 ccw(c33.725,21.82) 33.725,21.22 34.325,21.22 ccw(c34.866,21.32) 34.875,20.77 ccw(c34.888,21.321)
L4:
  region net NetFB80_2: 35.425,13.18 35.425,13.8 ccw(c34.888,13.68) 34.888,14.23 ccw(c34.888,13.697) 34.875,14.23 ccw(c34.866,13.68) 34.325,13.78 33.725,13.78 ccw(c33.725,13.18) 33.125,13.18 ccw(c33.725,13.18) 33.725,12.58 34.825,12.58 ccw(c34.825,13.18)
  region net NetFB80_2: 34.888,20.77 ccw(c34.888,21.32) 35.425,21.2 35.425,21.82 ccw(c34.825,21.82) 34.825,22.42 33.725,22.42 ccw(c33.725,21.82) 33.725,21.22 34.325,21.22 ccw(c34.866,21.32) 34.875,20.77 ccw(c34.888,21.321)

## Silkscreen, mask and mechanical layers (free items; w line width, h text height)
Top Overlay:
  drawing of 3 lines, arcs and shapes, not listed
  text "MCU" at 4.178,26.325 h2 r90
  text "SensWear" at 9.72,17.288 h3
  text "Debug" at 9.72,13.889 h3
  text "MPU" at 4.6,4 h2 r90
Bottom Overlay:
  text "V1.R1" at 1.95,33.05 h1
  text "IO" at 13.125,23.025 h1
  text "CLK" at 18.6,23.025 h1
  text "1" at 2.75,20.55 h1 r90
  text "RST" at 11.05,19.975 h1
  text "GND" at 16.05,19.975 h1
  text "1V8" at 21.1,19.975 h1
  text "IO" at 13.65,13.35 h1
  text "CLK" at 19.125,13.35 h1
  text "RST" at 11.575,10.3 h1
  text "GND" at 16.575,10.3 h1
  text "1V8" at 21.8,10.275 h1
  text "V2.R1" at 7.375,0.65 h1
Mechanical 1:
  the board outline again, w0.25

## Dimensions
1,0 to 41,0 on Mechanical 13
41,35 to 41,0 on Mechanical 13

## Text inside footprints (layer, text, board x,y; h text height)
JLINK80A: Bottom Overlay "1" at 36.111,29.819 h1.52
JLINK80B: Bottom Overlay "1" at 35.971,6.229 h1.52